# Altium PCB 8 Motors.PcbDoc (part 1 of 4)
Units mm, origin at the board's own origin, x right, y up, seen from the top; angles counter-clockwise.
Board outline 155 x 95 mm, 4 copper layers (Top Layer, GND, POWER, Bottom Layer), stack 0.778 mm thick; 196 components, 175 nets, 825 pads, 449 vias.
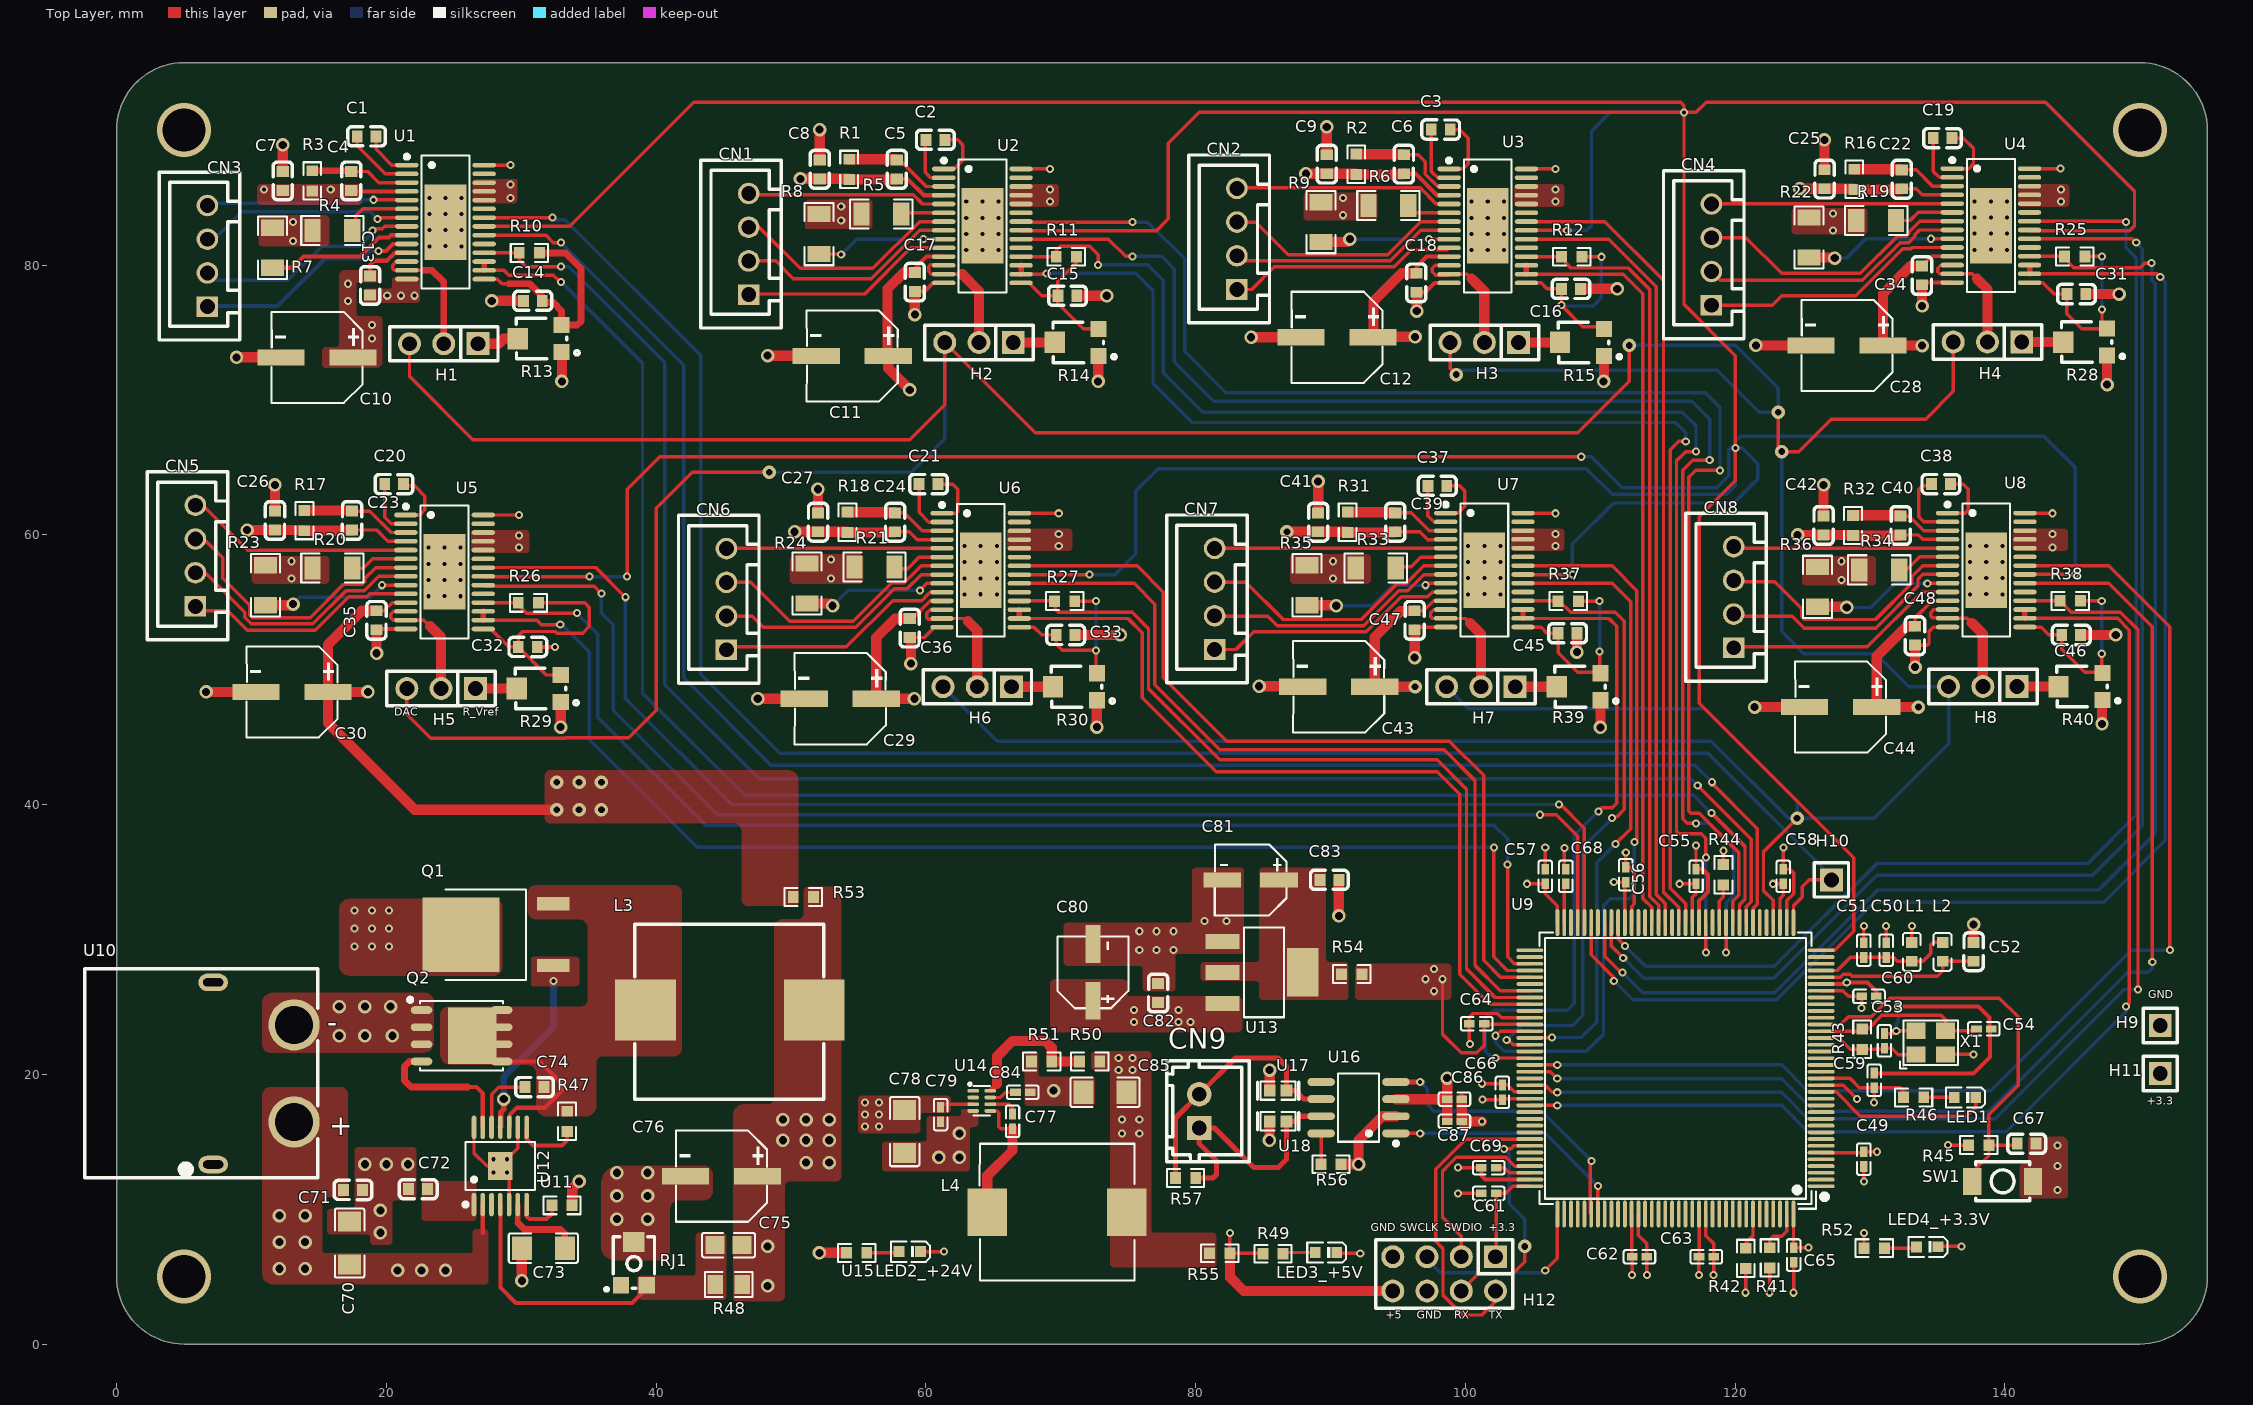
[diagram p0: Top Layer view]
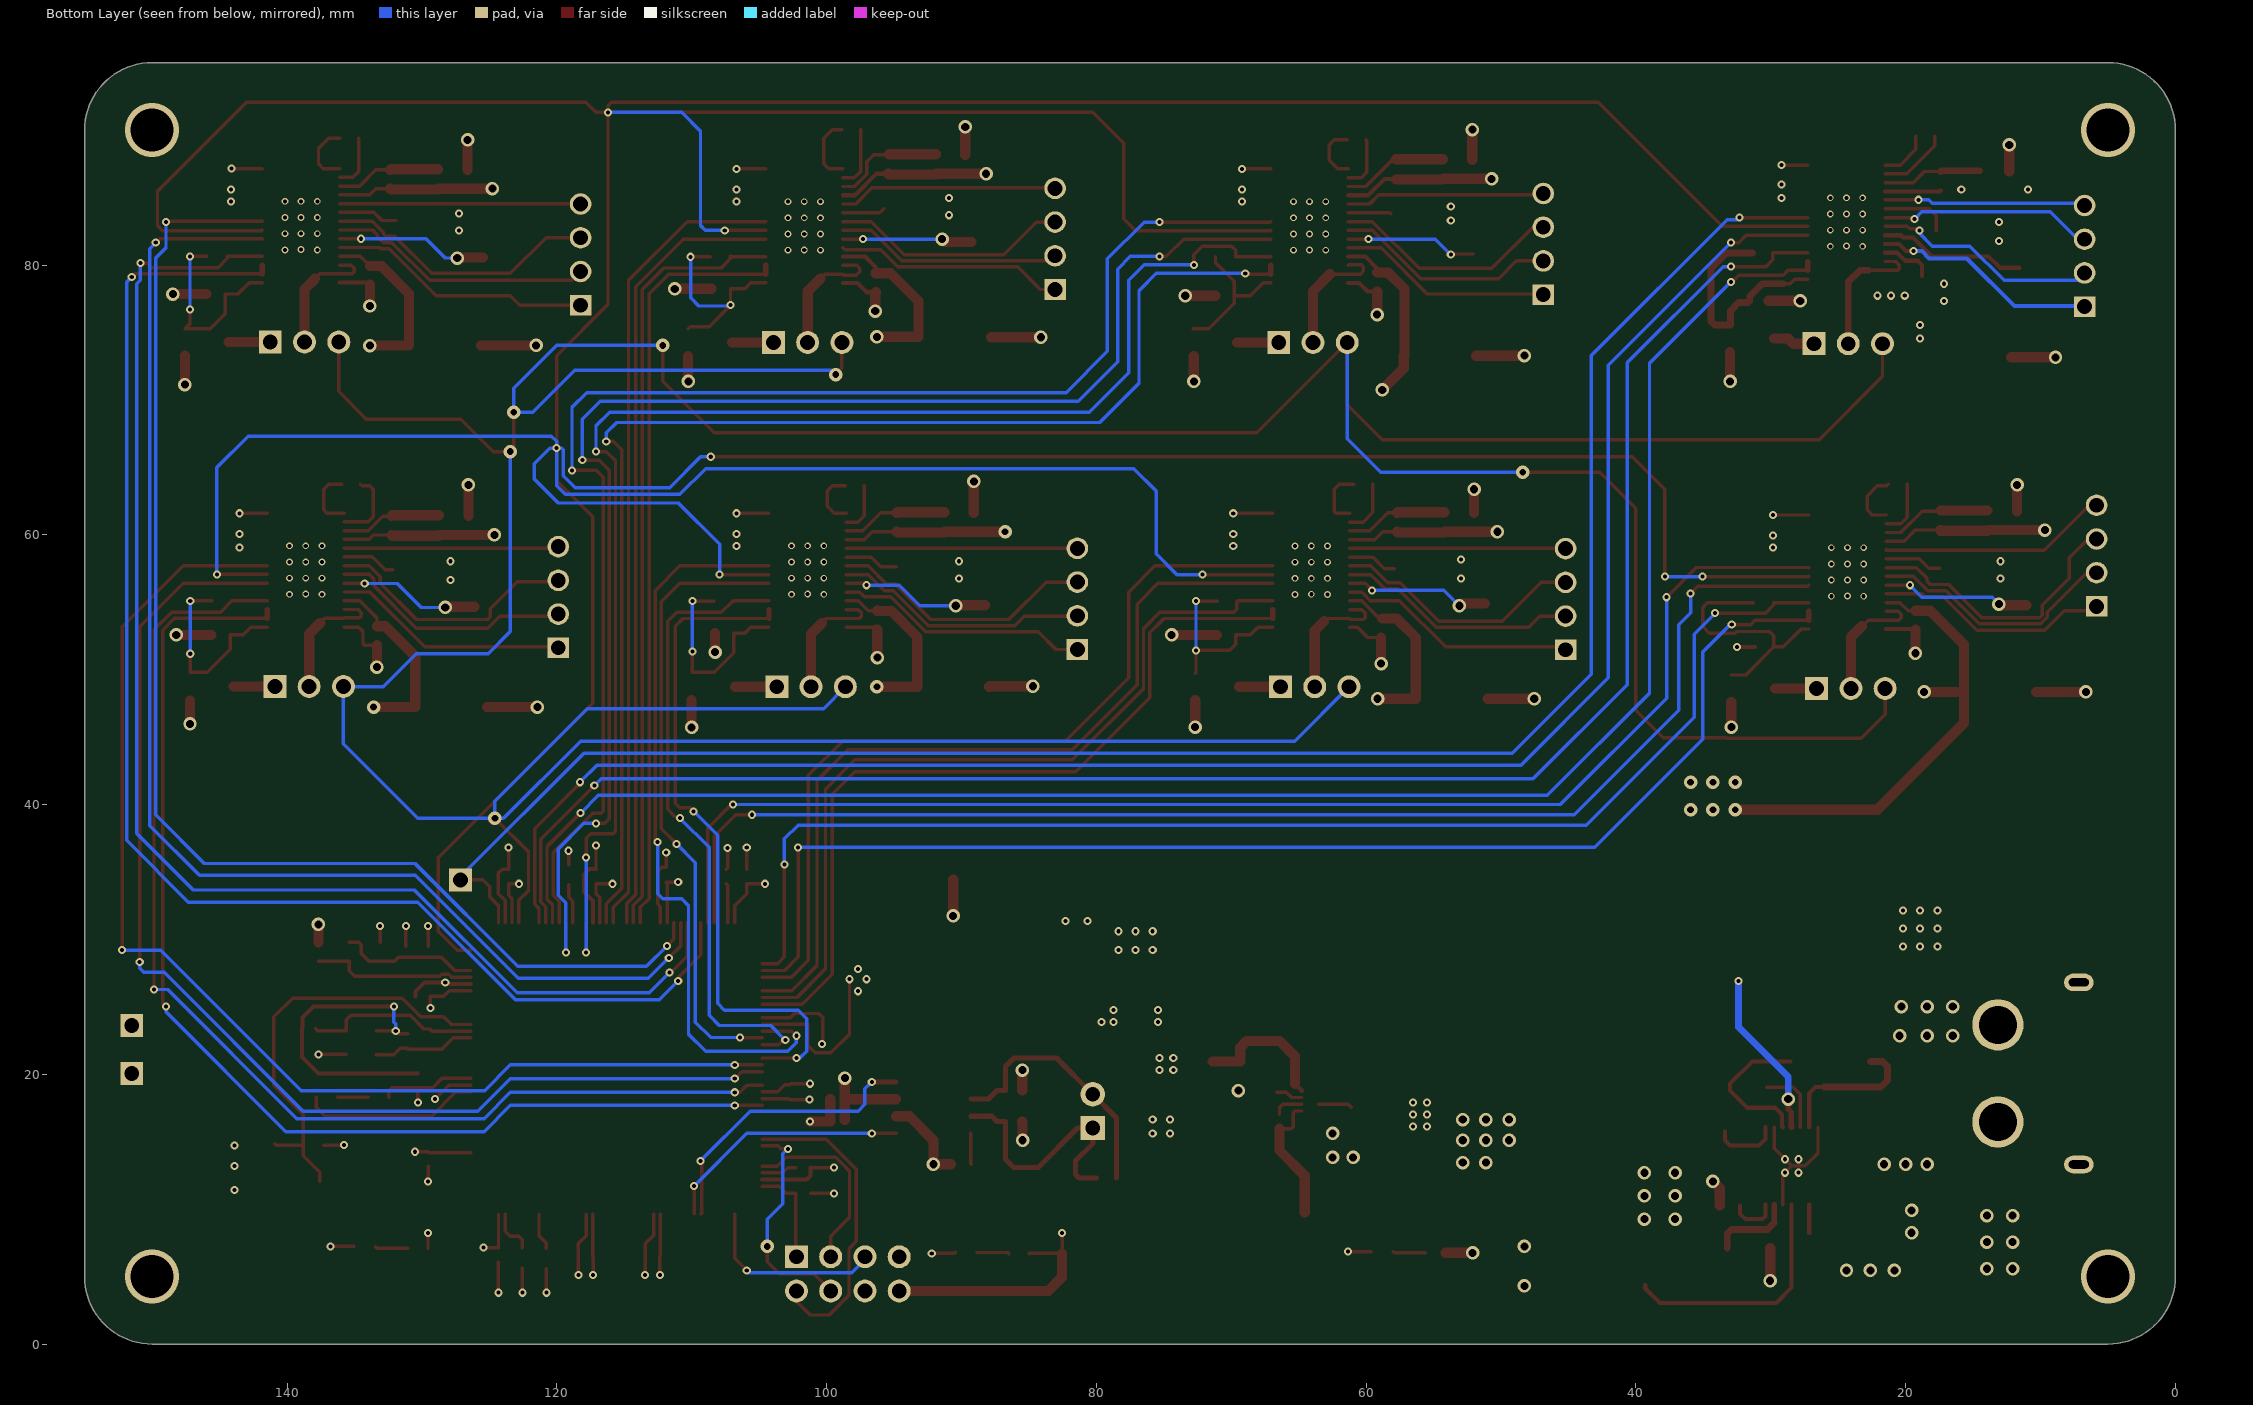
[diagram p1: Bottom Layer view, seen from below]
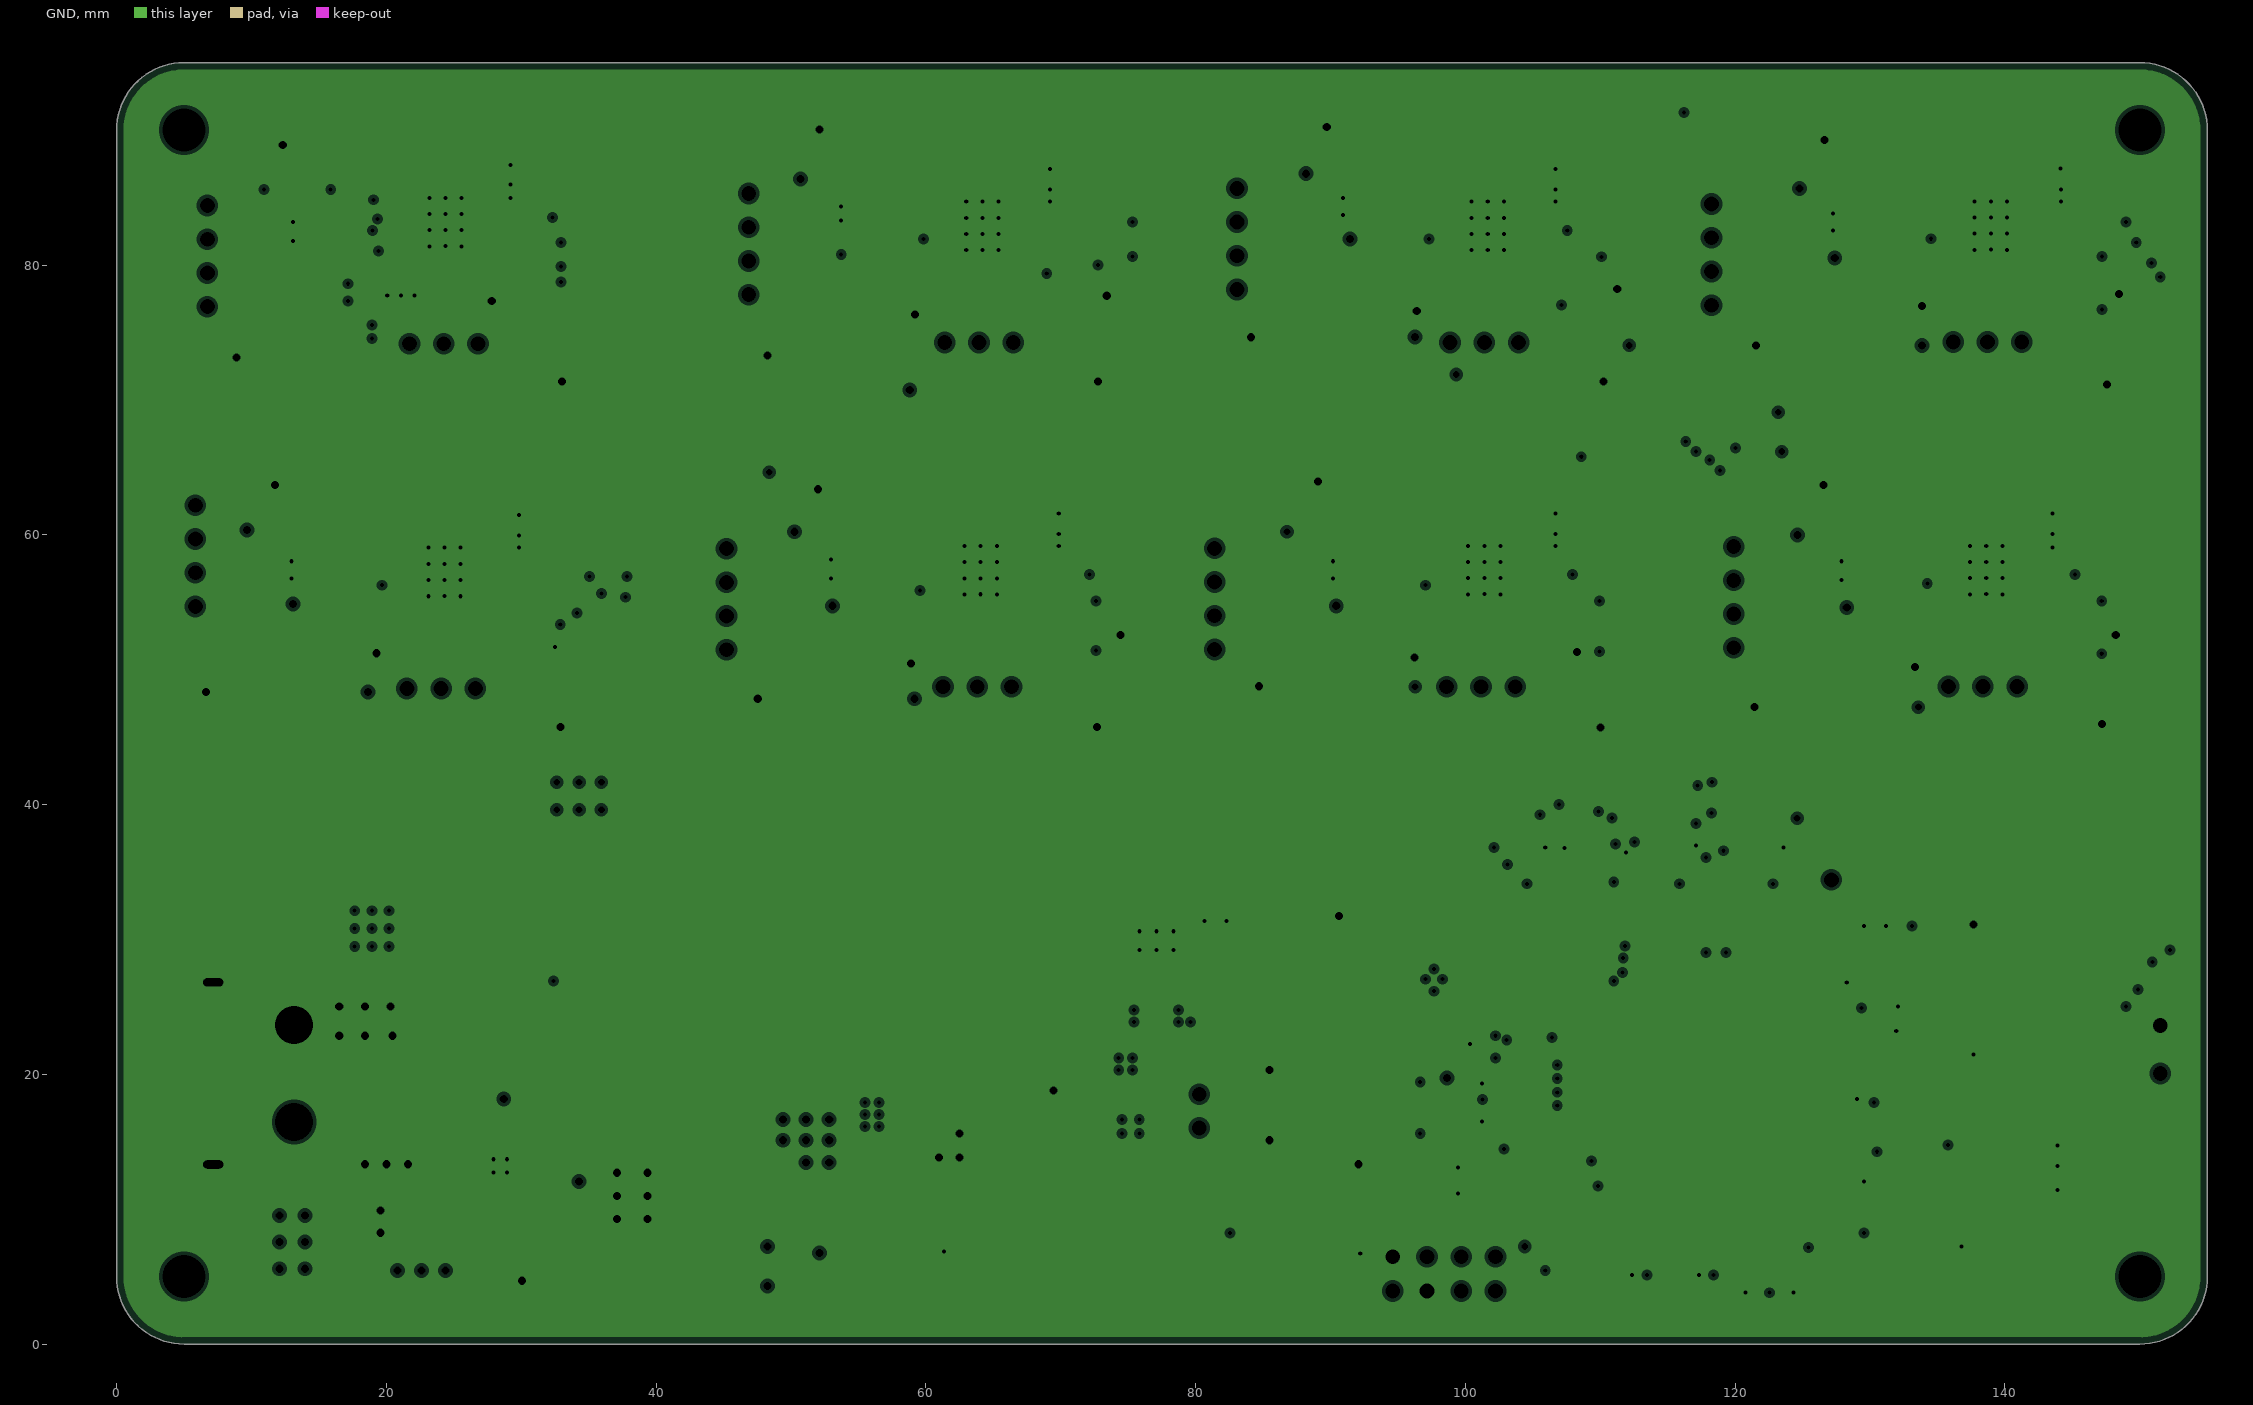
[diagram p2: GND, clearances drawn from the general rule]
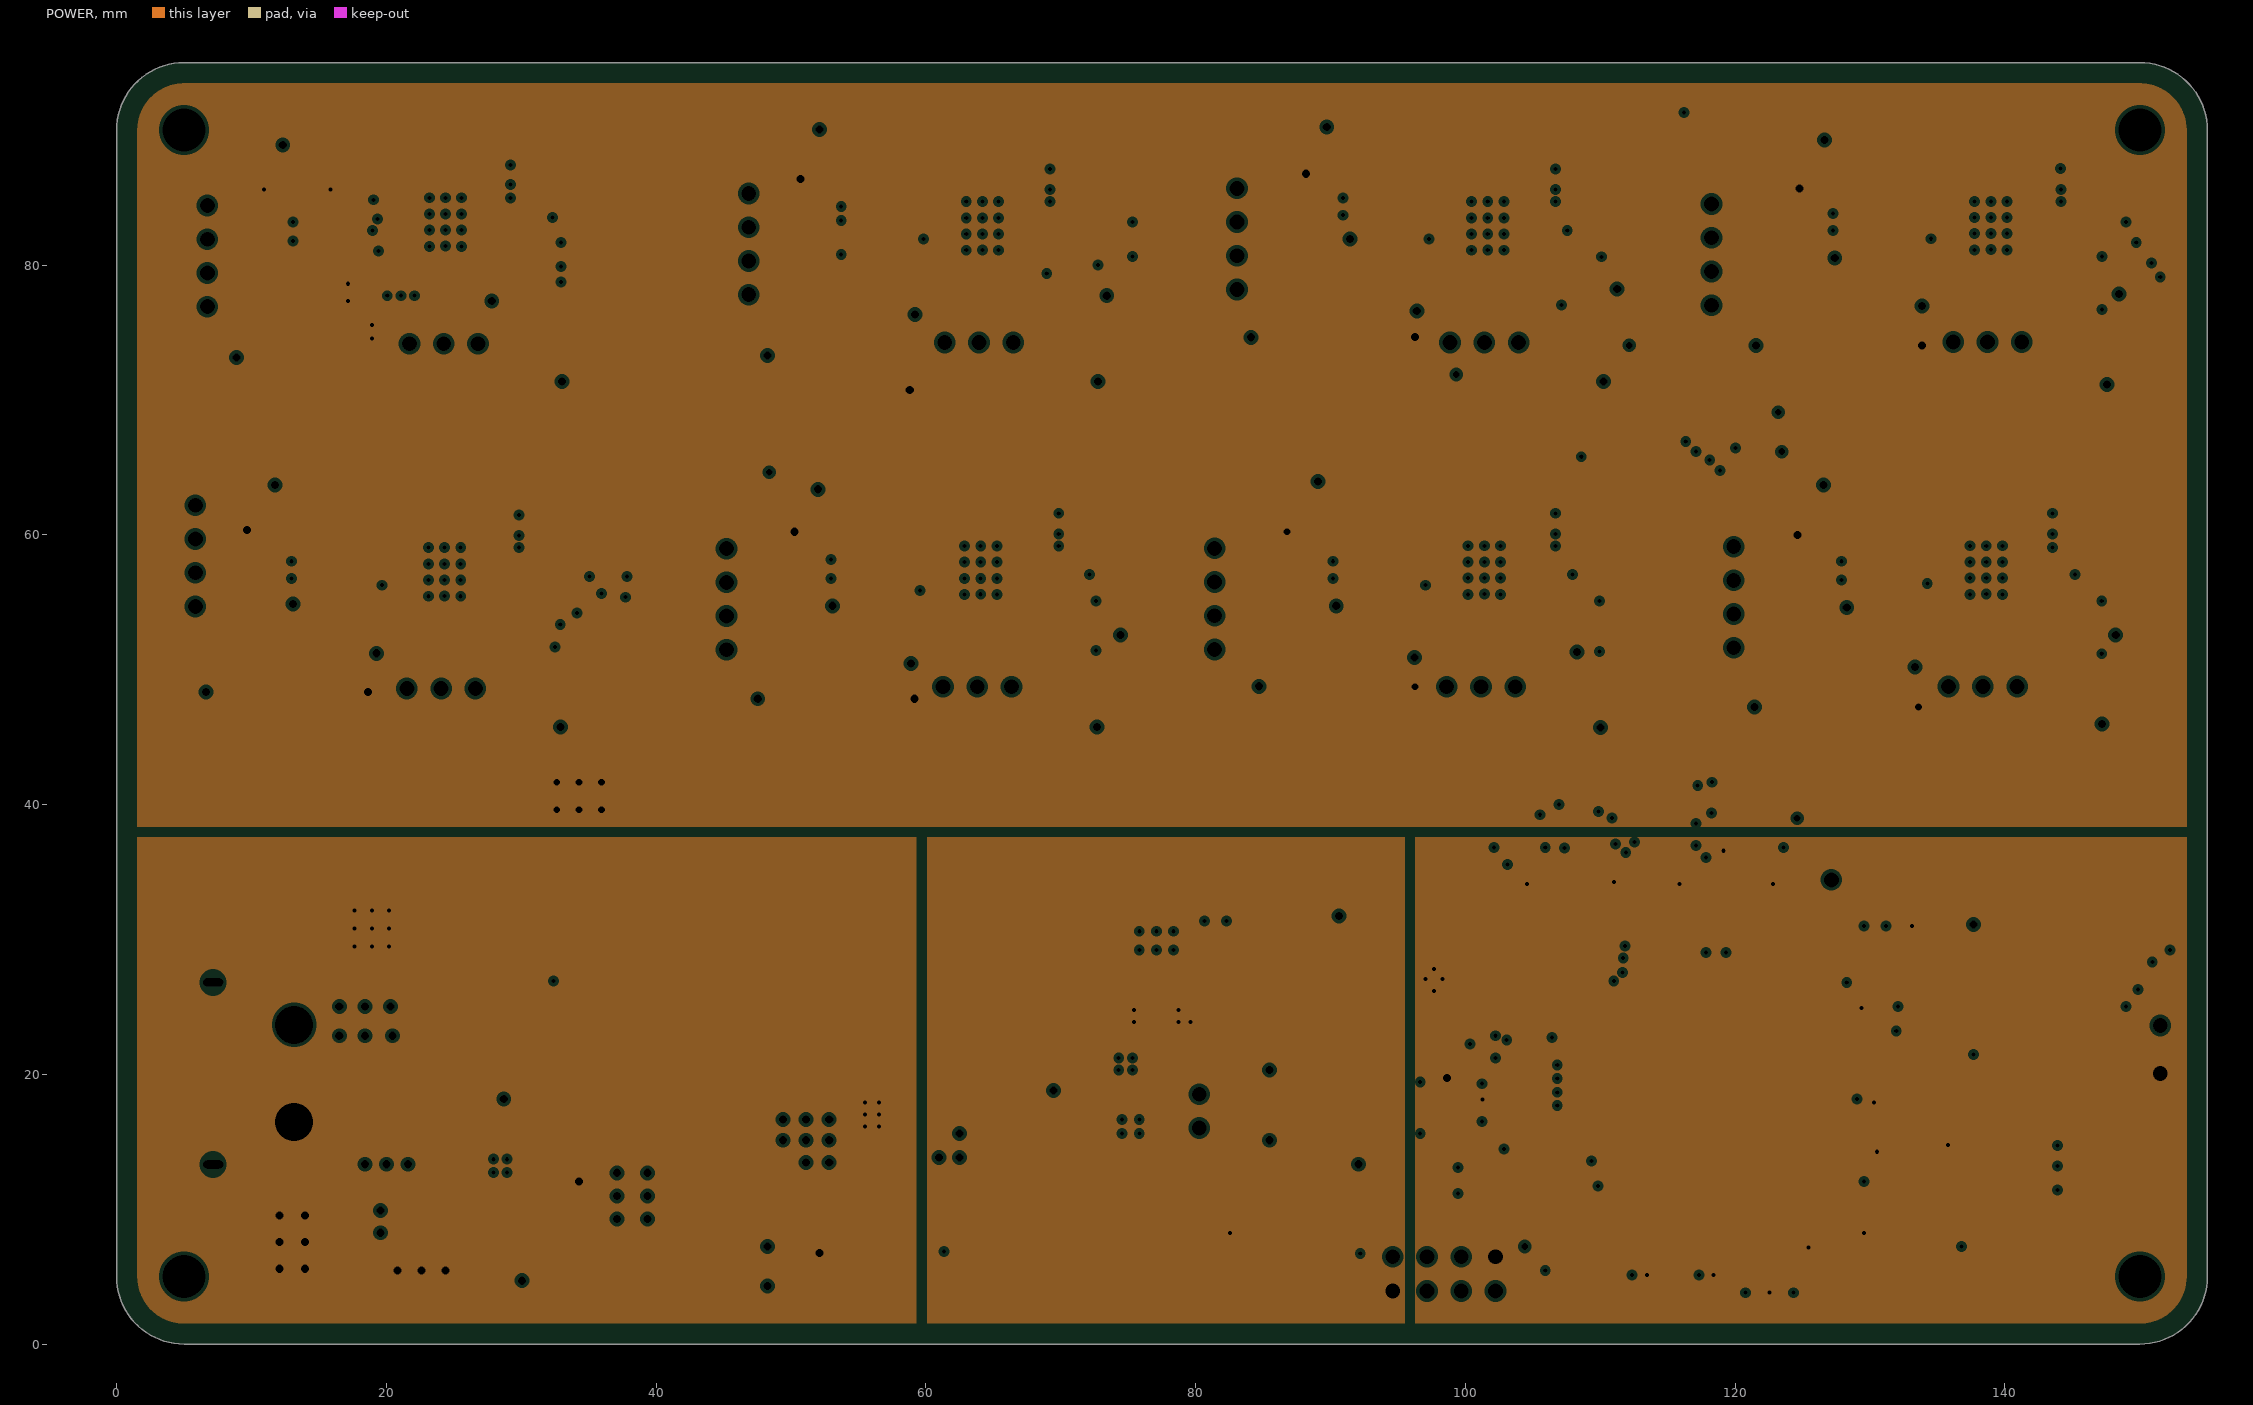
[diagram p3: POWER, clearances drawn from the general rule]

## Layer stack, top to bottom
Top Solder: solder mask 0.0102, Solder Resist, Dk 3.5
Top Layer: signal copper 0.0356
Dielectric 1: core 0.254, FR-4, Dk 4.2
GND: plane copper 0.036, net GND
Dielectric 3: prepreg 0.127, Dk 4.2
POWER: plane copper 0.036, net (Multiple Nets)
Dielectric 2: core 0.254, Dk 4.2
Bottom Layer: signal copper 0.0356
Bottom Solder: solder mask 0.0102, Solder Resist, Dk 3.5

## Board outline
0,5 0,90 cw(c5,90) 5,95 150,95 cw(c150,90) 155,90 155,5 cw(c150,5) 150,0 5,0 cw(c5,5)

## Design rules (kind name [scope] priority, off if disabled: settings)
Clearance [All] p1: gap=0.127 ignorepadtopadclearanceinfootprint=FALSE
DiffPairsRouting [All] p1: maxlimit=0.254 minlimit=0.254 mostfreqgap=0.254 toplayer_minwidth=0.381 toplayer_maxwidth=0.381 toplayer_prefwidth=0.381 bottomlayer_minwidth=0.381 bottomlayer_maxwidth=0.381 bottomlayer_prefwidth=0.381 maxuncoupledlength=12.7
HoleSize [All] p1: absolutevalues=TRUE maxlimit=5 minlimit=0.025 maxpercent=80.000 minpercent=20.000
PlaneClearance [All] p1: clearance=0.254
PlaneConnect [All] p1: planeconnectstyle=Relief reliefexpansion=0.508 reliefentries=4 reliefconductorwidth=0.254 reliefairgap=0.254
PolygonConnect [All] p1: connectstyle=Direct reliefconductorwidth=0.254 reliefentries=4 polygonreliefangle="90 Angle" airgapwidth=0.254
RoutingVias [All] p1: holewidth=0.6 width=1 viastyle="Through Hole" minholewidth=0.6 minwidth=1 maxholewidth=0.6 maxwidth=1
SilkToSolderMaskClearance [IsPad] p1 off: minsilkscreentomaskgap=0.254 clearancetoexposedcopper=TRUE
SolderMaskExpansion [All] p1: expansion=0.102
UnRoutedNet [All] p1: checkbadconnections=TRUE
Width [All] p1: maxlimit=2.032 minlimit=0.254 preferedwidth=0.254
24 further rules are at their usual default settings.

## Classes and differential pairs
component class 1: C49 C50 C51 C52 C53 C54 C55 C56 C57 C58 C59 C60 C61 C62 C63 C64 C65 C66 C67 C68 C69 C86 C87 CN9 H9 H10 H11 H12 L1 L2 LED1 R41 R42 R43 R44 R45 R46 R56 R57 SW1 U9 U16 U17 U18 X1
component class 2: C1 C2 C3 C4 C5 C6 C7 C8 C9 C10 C11 C12 C13 C14 C15 C16 C17 C18 C19 C20 C21 C22 C23 C24 C25 C26 C27 C28 C29 C30 C31 C32 C33 C34 C35 C36 C37 C38 C39 C40 C41 C42 C43 C44 C45 C46 C47 C48 CN1 CN2 CN3 CN4 CN5 CN6 CN7 CN8 H1 H2 H3 H4 H5 H6 H7 H8 R1 R2 R3 R4 R5 R6 R7 R8 R9 R10 R11 R12 R13 R14 R15 R16 R17 R18 R19 R20 R21 R22 R23 R24 R25 R26 R27 R28 R29 R30 R31 R32 R33 R34 R35 R36 R37 R38 R39 R40 U1 U2 U3 U4 U5 U6 U7 U8
component class Designator: C70 C71 C72 C73 C74 C75 C76 C77 C78 C79 C80 C81 C82 C83 C84 C85 L3 L4 LED2_+24V LED3_+5V LED4_+3.3V Q1 Q2 R47 R48 R49 R50 R51 R52 R53 R54 R55 RJ1 U10 U11 U12 U13 U14 U15
differential pair CAN: +CAN_P -CAN_N

## Components (designator, comment, footprint, x,y, rotation, side; value= is the part's Value field where it differs from the comment)
C1 "10nF" C0603 18.542,89.535 r0 top
C2 "10nF" C0603 60.706,89.281 r0 top
C3 "10nF" C0603 98.171,90.043 r0 top
C4 "100nF" C0603 17.399,86.233 r270 top
C5 "100nF" C0603 57.84,87.088 r270 top
C6 "100nF" C0603 95.432,87.469 r270 top
C7 "100nF" C0603 12.319,86.233 r270 top
C8 "100nF" C0603 52.125,87.088 r270 top
C9 "100nF" C0603 89.717,87.469 r270 top
C10 "100uF" SMD6.3_7.7_100uF 14.859,73.152 r180 top
C11 "100uF" SMD6.3_7.7_100uF 54.538,73.245 r180 top
C12 "100uF" SMD6.3_7.7_100uF 90.479,74.642 r180 top
C13 "100nF" C0603 18.796,78.486 r90 top
C14 "470nF" C0603 30.861,77.343 r0 top
C15 "470nF" C0603 70.485,77.724 r180 top
C16 "470nF" C0603 107.823,78.232 r180 top
C17 "100nF" C0603 59.182,78.74 r90 top
C18 "100nF" C0603 96.359,78.685 r90 top
C19 "10nF" C0603 135.382,89.408 r0 top
C20 "10nF" C0603 20.574,63.754 r0 top
C21 "10nF" C0603 60.198,63.754 r0 top
C22 "100nF" C0603 132.351,86.351 r270 top
C23 "100nF" C0603 17.454,61.053 r270 top
C24 "100nF" C0603 57.713,60.926 r270 top
C25 "100nF" C0603 126.619,86.36 r270 top
C26 "100nF" C0603 11.739,61.053 r270 top
C27 "100nF" C0603 51.998,60.926 r270 top
C28 "100uF" SMD6.3_7.7_100uF 128.287,74.032 r180 top
C29 "100uF" SMD6.3_7.7_100uF 53.649,47.845 r180 top
C30 "100uF" SMD6.3_7.7_100uF 13.009,48.353 r180 top
C31 "470nF" C0603 145.288,77.851 r180 top
C32 "470nF" C0603 30.48,51.689 r180 top
C33 "470nF" C0603 70.358,52.578 r180 top
C34 "100nF" C0603 133.849,79.231 r90 top
C35 "100nF" C0603 19.27,53.666 r90 top
C36 "100nF" C0603 58.801,53.086 r90 top
C37 "10nF" C0603 97.917,63.627 r0 top
C38 "10nF" C0603 135.255,63.754 r0 top
C39 "100nF" C0603 94.797,60.926 r270 top
C40 "100nF" C0603 132.262,60.687 r270 top
C41 "100nF" C0603 89.082,60.926 r270 top
C42 "100nF" C0603 126.547,60.687 r270 top
C43 "100uF" SMD6.3_7.7_100uF 90.606,48.734 r180 top
C44 "100uF" SMD6.3_7.7_100uF 127.817,47.225 r180 top
C45 "470nF" C0603 107.569,52.705 r180 top
C46 "470nF" C0603 144.907,52.578 r180 top
C47 "100nF" C0603 96.232,53.666 r90 top
C48 "100nF" C0603 133.331,52.523 r90 top
C49 "100nF" C0402_2.2uF 129.54,13.716 r270 top
C50 "10uF" C0402_2.2uF 131.191,29.21 r270 top
C51 "100nF" C0402_2.2uF 129.54,29.21 r270 top
C52 "22uF" C0603 137.668,29.083 r270 top
C53 "10pF" C0402_2.2uF 131.064,22.479 r270 top
C54 "10pF" C0402_2.2uF 138.43,23.368 r180 top
C55 "100nF" C0402_2.2uF 117.094,34.671 r90 top
C56 "100nF" C0402_2.2uF 111.887,34.798 r90 top
C57 "100nF" C0402_2.2uF 105.918,34.671 r90 top
C58 "100nF" C0402_2.2uF 123.571,34.671 r90 top
C59 "100nF" C0402_2.2uF 130.302,19.558 r90 top
C60 "100nF" C0402_2.2uF 129.921,25.781 r0 top
C61 "100nF" C0402_2.2uF 101.727,11.176 r180 top
C62 "100nF" C0402_2.2uF 112.903,6.477 r180 top
C63 "100nF" C0402_2.2uF 117.856,6.477 r180 top
C64 "100nF" C0402_2.2uF 100.838,23.749 r180 top
C65 "100nF" C0402_2.2uF 124.333,6.604 r270 top
C66 "100nF" C0402_2.2uF 102.743,18.669 r90 top
C67 "100nF" C0603 141.605,14.859 r180 top
C68 "2.2uF" C0402_2.2uF 107.442,34.671 r270 top
C69 "2.2uF" C0402_2.2uF 101.727,13.081 r0 top
C70 "4.7uF" C1206 17.272,7.493 r270 top
C71 "100nF" C0603 17.526,11.43 r180 top
C72 "2.2uF" C0603 22.352,11.488 r180 top
C73 "15nF" C1206 31.637,7.112 r0 top
C74 "470nF" C0603 30.988,19.05 r0 top
C75 "82pF" C0805 45.369,7.338 r0 top
C76 "180uF" SMD6.3_10_180uF 44.845,12.446 r180 top
C77 "100nF" C0402_2.2uF 66.421,16.51 r270 top
C78 "10uF" C1206 58.42,15.748 r90 top
C79 "100nF" C0402_2.2uF 61.087,17.018 r90 top
C80 "10uF" SMD5_5.4_10uF 72.39,27.559 r90 top
C81 "10uF" SMD5_5.4_10uF 84.074,34.417 r180 top
C82 "100nF" C0603 77.216,26.035 r90 top
C83 "100nF" C0603 89.916,34.417 r0 top
C84 "33nF" C0402_2.2uF 67.183,18.669 r180 top
C85 "47uF" C1206 73.279,18.669 r0 top
C86 "10uF" C0402_2.2uF 99.187,18.161 r0 top
C87 "100nF" C0402_2.2uF 99.187,16.51 r0 top
CN1 "#NAME?" ZX-XH2.54-4PZZ 46.863,81.554 r90 top
CN2 "#NAME?" ZX-XH2.54-4PZZ 83.058,81.935 r90 top
CN3 "#NAME?" ZX-XH2.54-4PZZ 6.731,80.665 r90 top
CN4 "#NAME?" ZX-XH2.54-4PZZ 118.237,80.772 r90 top
CN5 "#NAME?" ZX-XH2.54-4PZZ 5.842,58.44 r90 top
CN6 "#NAME?" ZX-XH2.54-4PZZ 45.212,55.225 r90 top
CN7 "#NAME?" ZX-XH2.54-4PZZ 81.407,55.245 r90 top
CN8 "#NAME?" ZX-XH2.54-4PZZ 119.888,55.372 r90 top
CN9 "#NAME?" ZX-XH2.54-2PZZ 80.264,17.272 r90 top
H1 "#NAME?" HC-1.25-3PLT 24.257,74.168 r180 top
H2 "#NAME?" HC-1.25-3PLT 63.936,74.261 r180 top
H3 "#NAME?" HC-1.25-3PLT 101.401,74.261 r180 top
H4 "#NAME?" HC-1.25-3PLT 138.701,74.286 r180 top
H5 "#NAME?" HC-1.25-3PLT 24.058,48.607 r180 top
H6 "#NAME?" HC-1.25-3PLT 63.809,48.734 r180 top
H7 "#NAME?" HC-1.25-3PLT 101.147,48.734 r180 top
H8 "#NAME?" HC-1.25-3PLT 138.358,48.749 r180 top
H9 "#NAME?" Testpoint 151.511,23.622 r270 top
H10 "#NAME?" Testpoint 127.127,34.417 r270 top
H11 "#NAME?" Testpoint 151.511,20.066 r0 top
H12 "#NAME?" HC-1.25-8PLT 98.425,5.207 r180 top
L1 "22uH" L0603_22uH 133.096,29.083 r90 top
L2 "22uH" L0603_22uH 135.382,29.083 r90 top
L3 "3.3uH" L1360 45.466,24.765 r0 top
L4 "10uH" L1110_10uH 69.723,9.779 r0 top
LED1 "#NAME?" LED 137.033,18.288 r180 top
LED2_+24V "#NAME?" LED 58.801,6.858 r180 top (schematic designator LED2)
LED3_+5V "#NAME?" LED 89.662,6.794 r180 top (schematic designator LED3)
LED4_+3.3V "#NAME?" LED 134.239,7.207 r180 top (schematic designator LED4)
Q1 "#NAME?" NMOS 28.956,30.353 r180 top
Q2 "#NAME?" CSD18533Q5A 25.576,22.86 r270 top
R1 "1MΩ" R0603 54.311,87.088 r90 top
R2 "1MΩ" R0603 91.903,87.469 r90 top
R3 "1MΩ" R0603 14.505,86.233 r90 top
R4 "200mΩ" R1206_200mΩ 16.002,82.55 r0 top
R5 "200mΩ" R1206_200mΩ 56.697,83.786 r0 top
R6 "200mΩ" R1206_200mΩ 94.289,84.421 r0 top
R7 "200mΩ" R1206_200mΩ 11.557,81.28 r270 top
R8 "200mΩ" R1206_200mΩ 52.07,82.296 r270 top
R9 "200mΩ" R1206_200mΩ 89.281,83.185 r270 top
R10 "10kΩ" R0603_10KΩ 30.607,80.899 r0 top
R11 "10kΩ" R0603_10KΩ 70.413,80.611 r0 top
R12 "10kΩ" R0603_10KΩ 107.878,80.611 r0 top
R13 "10kΩ" R10k_KT 31.369,74.549 r0 top
R14 "10kΩ" R10k_KT 71.175,74.261 r0 top
R15 "10kΩ" R10k_KT 108.64,74.261 r0 top
R16 "1MΩ" R0603 128.822,86.351 r90 top
R17 "1MΩ" R0603 13.925,61.053 r90 top
R18 "1MΩ" R0603 54.184,60.926 r90 top
R19 "200mΩ" R1206_200mΩ 130.446,83.303 r0 top
R20 "200mΩ" R1206_200mΩ 16.002,57.531 r0 top
R21 "200mΩ" R1206_200mΩ 56.189,57.624 r0 top
R22 "200mΩ" R1206_200mΩ 125.476,82.042 r270 top
R23 "200mΩ" R1206_200mΩ 11.049,56.261 r270 top
R24 "200mΩ" R1206_200mΩ 51.181,56.388 r270 top
R25 "10kΩ" R0603_10KΩ 145.178,80.636 r0 top
R26 "10kΩ" R0603_10KΩ 30.535,54.957 r0 top
R27 "10kΩ" R0603_10KΩ 70.286,55.084 r0 top
R28 "10kΩ" R10k_KT 145.94,74.286 r0 top
R29 "10kΩ" R10k_KT 31.297,48.607 r0 top
R30 "10kΩ" R10k_KT 71.048,48.734 r0 top
R31 "1MΩ" R0603 91.268,60.926 r90 top
R32 "1MΩ" R0603 128.733,60.687 r90 top
R33 "200mΩ" R1206_200mΩ 93.345,57.531 r0 top
R34 "200mΩ" R1206_200mΩ 130.683,57.404 r0 top
R35 "200mΩ" R1206_200mΩ 88.265,56.261 r270 top
R36 "200mΩ" R1206_200mΩ 126.111,56.134 r270 top
R37 "10kΩ" R0603_10KΩ 107.624,55.084 r0 top
R38 "10kΩ" R0603_10KΩ 144.835,55.099 r0 top
R39 "10kΩ" R10k_KT 108.386,48.734 r0 top
R40 "10kΩ" R10k_KT 145.597,48.749 r0 top
R41 "0Ω" R0603 122.555,6.388 r90 top
R42 "0Ω" R0603 120.777,6.35 r90 top
R43 "1MΩ" R0603 129.413,22.606 r90 top
R44 "10kΩ" R0603_10KΩ 119.126,34.798 r90 top
R45 "10kΩ" R0603_10KΩ 138.049,14.753 r180 top
R46 "2kΩ" R0603 133.223,18.288 r180 top
R47 "2.15kΩ" R0603 33.401,16.51 r90 top
R48 "140kΩ" R0805 45.385,4.417 r0 top
R49 "10kΩ" R0603_10KΩ 85.734,6.7 r180 top
R50 "52.3kΩ" R0603_10KΩ 72.136,20.955 r0 top
R51 "10kΩ" R0603_10KΩ 68.58,20.955 r0 top
R52 "4.7kΩ" R0603_10KΩ 130.302,7.112 r180 top
R53 "0Ω" R0603 50.918,33.147 r180 top
R54 "0Ω" R0603 91.567,27.432 r0 top
R55 "0Ω" R0603 81.788,6.731 r0 top
R56 "10kΩ" R0603 90.034,13.335 r0 top
R57 "120Ω" R0603 79.248,12.319 r0 top
RJ1 "20kΩ" R20k_KT 38.354,5.969 r0 top
SW1 "#NAME?" Switch 139.827,12.065 r0 top
U1 "#NAME?" DRV8825PWPR 24.384,83.185 r270 top
U2 "#NAME?" DRV8825PWPR 64.19,82.897 r270 top
U3 "#NAME?" DRV8825PWPR 101.655,82.897 r270 top
U4 "#NAME?" DRV8825PWPR 138.955,82.922 r270 top
U5 "#NAME?" DRV8825PWPR 24.312,57.243 r270 top
U6 "#NAME?" DRV8825PWPR 64.063,57.37 r270 top
U7 "#NAME?" DRV8825PWPR 101.401,57.385 r270 top
U8 "#NAME?" DRV8825PWPR 138.612,57.385 r270 top
U9 "#NAME?" STM32F407ZGT6 115.57,20.447 r90 top
U10 "#NAME?" XT60PW-F 10.16,20.066 r90 top
U11 "147kΩ" R0603 33.02,10.287 r0 top
U12 "#NAME?" LM3150MHX/NOPB 28.448,13.208 r0 top
U13 "#NAME?" AMS1117-3.3 84.963,27.559 r180 top
U14 "#NAME?" TPS62932DRLR 64.135,18.034 r270 top
U15 "100kΩ" R0603 54.864,6.763 r180 top
U16 "#NAME?" SN65HVD230DR 92.075,17.526 r90 top
U17 "#NAME?" PESD0603-240 86.106,18.796 r0 top
U18 "#NAME?" PESD0603-240 86.106,16.51 r0 top
X1 "8MHz" Osc_8M 134.493,22.352 r0 top

## Footprints (in the part's own frame and the unit in brackets; to place one, negate y for a bottom-side part, rotate by r counter-clockwise, add the part's x,y. Pads: shape width x height; smd on the part's side, far side on the other; paste and mask are expansions set on the pad)
AMS1117-3.3 [mm] "SOT-223-3_L6.5-W3.4-P2.30-LS7.0-BR"
  rect 2.5x1.1 smd: 1(2.97,-2.3) 2(2.97,0) 3(2.97,2.3)
  rect 2.34x3.6 smd: 4(-2.97,0)
  silkscreen extent -1.57,-3.33 1.37,3.33
C0402_2.2uF [mm] "C0402"
  rect 0.79x0.54 smd paste-100 mask+0.051: 1(-0.545,0) 2(0.545,0)
  silkscreen extent -1.17,-0.5 1.17,0.5
C0603 [mm] "C0603"
  rect 0.8x0.9 smd: 1(-0.7,0) 2(0.7,0)
  silkscreen extent -1.41,-0.71 1.39,0.72
C0805 [mm] "C0805"
  rect 1.41x1.35 smd paste-100 mask+0.051: 1(-1,0) 2(1,0)
  silkscreen extent -1.96,-0.9 1.96,0.9
C1206 [mm] "C1206"
  rect 1.485x1.728 smd paste-100 mask+0.051: 1(-1.593,0) 2(1.593,0)
  silkscreen extent -2.56,-1.09 2.56,1.09
CSD18533Q5A [mm] "PQFN-8_L5.8-W4.9-P1.27-LS6.0-BL"
  oval 0.574x1.6 smd paste-100 mask+0.051: 1(-1.905,-2.97) 2(-0.635,-2.97) 3(0.635,-2.97) 4(1.905,-2.97) 5(1.905,2.97) 6(0.635,2.97) 7(-0.635,2.97) 8(-1.905,2.97)
  rect 4.2x3.58 smd paste-100 mask+0.051: 9(0,0.788)
  silkscreen extent -2.82,-3.96 2.58,3.08
DRV8825PWPR [mm] "HTSSOP-28_L9.7-W4.4-P0.65-LS6.4-BL-EP"
  oval 0.343x1.731 smd: 1(-4.225,-2.866) 2(-3.575,-2.866) 3(-2.925,-2.866) 4(-2.275,-2.866) 5(-1.625,-2.866) 6(-0.975,-2.866) 7(-0.325,-2.866) 8(0.325,-2.866) 9(0.975,-2.866) 10(1.625,-2.866) 11(2.275,-2.866) 12(2.925,-2.866) 13(3.575,-2.866) 14(4.225,-2.866) 15(4.225,2.866) 16(3.575,2.866) 17(2.925,2.866) 18(2.275,2.866) 19(1.625,2.866) 20(0.975,2.866) 21(0.325,2.866) 22(-0.325,2.866) 23(-0.975,2.866) 24(-1.625,2.866) 25(-2.275,2.866) 26(-2.925,2.866) 27(-3.575,2.866) 28(-4.225,2.866)
  rect 5.6x3.1 smd paste+0 mask+0.05: 29(0,0)
  silkscreen extent -5,-3.02 4.93,1.77
HC-1.25-3PLT [mm] "HDR-TH_3P-P2.54-V-M"
  rect 1.7x1.7 hole 1.1: 1(-2.54,0)
  round 1.7 hole 1.1: 2(0,0) 3(2.54,0)
  silkscreen extent -4.02,-1.27 4.02,1.27
HC-1.25-8PLT [mm] "HDR-TH_8P-P2.54-V-M-R2-C4-S2.54"
  rect 1.7x1.7 hole 1.1: 1(-3.81,-1.27)
  round 1.7 hole 1.1: 2(-3.81,1.27) 3(-1.27,-1.27) 4(-1.27,1.27) 5(1.27,-1.27) 6(1.27,1.27) 7(3.81,-1.27) 8(3.81,1.27)
  silkscreen extent -5.08,-2.54 5.08,2.54
L0603_22uH [mm] "L0603"
  rect 0.8x0.864 smd paste-100 mask+0.051: 1(-0.7,0) 2(0.7,0)
  silkscreen extent -1.42,-0.65 1.41,0.67
L1110_10uH [mm] "IND-SMD_L11.5-W10.0_SMMS1040"
  rect 2.924x3.5 smd: 1(-5.18,0) 2(5.18,0)
  silkscreen extent -5.74,-5.08 5.75,5.08
L1360 [mm] "IND-SMD_L13.8-W12.6"
  rect 4.5x4.5 smd: 1(-6.25,0) 2(6.25,0)
  silkscreen extent -7.05,-6.63 6.95,6.37
LED [mm] "LED0603-RD_GREEN"
  rect 0.8x0.8 smd: 1(-0.799,-0.003) 2(0.799,0.003)
  silkscreen extent -1.49,-0.75 1.39,0.76
LM3150MHX/NOPB [mm] "HTSSOP-14_L5.0-W4.4-P0.65-LS6.4-BL-EP"
  oval 0.343x1.731 smd: 1(-1.95,-2.866) 2(-1.3,-2.866) 3(-0.65,-2.866) 4(0,-2.866) 5(0.65,-2.866) 6(1.3,-2.866) 7(1.95,-2.866) 8(1.95,2.866) 9(1.3,2.866) 10(0.65,2.866) 11(0,2.866) 12(-0.65,2.866) 13(-1.3,2.866) 14(-1.95,2.866)
  rect 1.83x2.055 smd: 15(0,0)
  silkscreen extent -2.72,-3.02 2.58,1.77
NMOS [mm] "TO-252-2_L6.6-W6.1-P4.58-LS9.9-TL"
  rect 2.409x0.979 smd: 1(-3.424,2.29) 3(-3.423,-2.29)
  rect 5.711x5.548 smd: 2(3.424,0)
  silkscreen extent -1.38,-3.35 4.58,3.35
Osc_8M [mm] "OSC-SMD_4P-L3.2-W2.5-BL"
  rect 1.4x1.2 smd: 1(-1.1,-0.875) 2(1.1,-0.875) 3(1.1,0.875) 4(-1.1,0.875)
  silkscreen extent -2.29,-1.9 2.03,1.65
PESD0603-240 [mm] "D0603-BI"
  rect 0.873x0.907 smd paste-100 mask+0.051: 1(-0.622,0) 2(0.622,0)
  silkscreen extent -1.52,-0.68 1.52,0.68
R10k_KT [mm] "RES-ADJ-SMD_3P-L3.0-W3.8-P1.75-BR"
  rect 1.2x1.2 smd: 1(1.625,-1) 3(1.625,1)
  rect 1.5x1.6 smd: 2(-1.625,0)
  silkscreen extent -1.75,-1.51 2.92,1.51
R20k_KT [mm] "RES-ADJ-SMD_TC33X-2-104E"
  rect 1.2x1.2 smd: 1(-0.95,-1.6) 3(0.95,-1.6)
  rect 1.6x1.5 smd: 2(0,1.6)
  silkscreen extent -2.16,-2.03 1.52,1.98
R0603 [mm] "0603"
  rect 0.806x0.864 smd paste-100 mask+0.051: 1(-0.753,0) 2(0.753,0)
  silkscreen extent -1.39,-0.66 1.39,0.66
R0603_10KΩ [mm] "R0603"
  rect 0.806x0.864 smd paste-100 mask+0.051: 1(-0.753,0) 2(0.753,0)
  silkscreen extent -1.39,-0.66 1.39,0.66
R0805 [mm] "R0805"
  rect 1.133x1.377 smd paste-100 mask+0.051: 1(-1,0) 2(1,0)
  silkscreen extent -1.76,-0.92 1.76,0.92
R1206_200mΩ [mm] "R1206"
  rect 1.208x1.701 smd paste-100 mask+0.051: 1(-1.479,0) 2(1.479,0)
  silkscreen extent -2.31,-1.08 2.31,1.08
SMD5_5.4_10uF [mm] "CAP-SMD_BD5.0-L5.3-W5.3-FD"
  rect 2.8x1.1 smd: 1(-2.1,0) 2(2.1,0)
  silkscreen extent -2.66,-2.62 2.66,2.65
SMD6.3_7.7_100uF [mm] "CAP-SMD_BD6.3-L6.6-W6.6-LS7.4-FD"
  rect 3.5x1.2 smd: 1(-2.67,0) 2(2.67,0)
  silkscreen extent -3.38,-3.38 3.38,3.38
SMD6.3_10_180uF [mm] "CAP-SMD_BD6.3-L6.6-W6.6-LS7.3-FD"
  rect 3.5x1.2 smd: 1(-2.67,0) 2(2.67,0)
  silkscreen extent -3.38,-3.38 3.38,3.38
SN65HVD230DR [mm] "SOIC-8_L4.9-W3.9-P1.27-LS6.0-BL"
  oval 0.588x2.045 smd: 1(-1.905,-2.772) 2(-0.635,-2.772) 3(0.635,-2.772) 4(1.905,-2.772) 5(1.905,2.772) 6(0.635,2.772) 7(-0.635,2.772) 8(-1.905,2.772)
  silkscreen extent -2.8,-2.92 2.53,1.52
STM32F407ZGT6 [mm] "LQFP-144_L20.0-W20.0-P0.50-LS22.0-BL"
  oval 0.28x2 smd: 1(-8.75,-10.8) 2(-8.25,-10.8) 3(-7.75,-10.8) 4(-7.25,-10.8) 5(-6.75,-10.8) 6(-6.25,-10.8) 7(-5.75,-10.8) 8(-5.25,-10.8) 9(-4.75,-10.8) 10(-4.25,-10.8) 11(-3.75,-10.8) 12(-3.25,-10.8) 13(-2.75,-10.8) 14(-2.25,-10.8) 15(-1.75,-10.8) 16(-1.25,-10.8) 17(-0.75,-10.8) 18(-0.25,-10.8) 19(0.25,-10.8) 20(0.75,-10.8) 21(1.25,-10.8) 22(1.75,-10.8) 23(2.25,-10.8) 24(2.75,-10.8) 25(3.25,-10.8) 26(3.75,-10.8) 27(4.25,-10.8) 28(4.75,-10.8) 29(5.25,-10.8) 30(5.75,-10.8) 31(6.25,-10.8) 32(6.75,-10.8) 33(7.25,-10.8) 34(7.75,-10.8) 35(8.25,-10.8) 36(8.75,-10.8) 73(8.75,10.8) 74(8.25,10.8) 75(7.75,10.8) 76(7.25,10.8) 77(6.75,10.8) 78(6.25,10.8) 79(5.75,10.8) 80(5.25,10.8) 81(4.75,10.8) 82(4.25,10.8) 83(3.75,10.8) 84(3.25,10.8) 85(2.75,10.8) 86(2.25,10.8) 87(1.75,10.8) 88(1.25,10.8) 89(0.75,10.8) 90(0.25,10.8) 91(-0.25,10.8) 92(-0.75,10.8) 93(-1.25,10.8) 94(-1.75,10.8) 95(-2.25,10.8) 96(-2.75,10.8) 97(-3.25,10.8) 98(-3.75,10.8) 99(-4.25,10.8) 100(-4.75,10.8) 101(-5.25,10.8) 102(-5.75,10.8) 103(-6.25,10.8) 104(-6.75,10.8) 105(-7.25,10.8) 106(-7.75,10.8) 107(-8.25,10.8) 108(-8.75,10.8)
  oval 2x0.28 smd: 37(10.8,-8.75) 38(10.8,-8.25) 39(10.8,-7.75) 40(10.8,-7.25) 41(10.8,-6.75) 42(10.8,-6.25) 43(10.8,-5.75) 44(10.8,-5.25) 45(10.8,-4.75) 46(10.8,-4.25) 47(10.8,-3.75) 48(10.8,-3.25) 49(10.8,-2.75) 50(10.8,-2.25) 51(10.8,-1.75) 52(10.8,-1.25) 53(10.8,-0.75) 54(10.8,-0.25) 55(10.8,0.25) 56(10.8,0.75) 57(10.8,1.25) 58(10.8,1.75) 59(10.8,2.25) 60(10.8,2.75) 61(10.8,3.25) 62(10.8,3.75) 63(10.8,4.25) 64(10.8,4.75) 65(10.8,5.25) 66(10.8,5.75) 67(10.8,6.25) 68(10.8,6.75) 69(10.8,7.25) 70(10.8,7.75) 71(10.8,8.25) 72(10.8,8.75) 109(-10.8,8.75) 110(-10.8,8.25) 111(-10.8,7.75) 112(-10.8,7.25) 113(-10.8,6.75) 114(-10.8,6.25) 115(-10.8,5.75) 116(-10.8,5.25) 117(-10.8,4.75) 118(-10.8,4.25) 119(-10.8,3.75) 120(-10.8,3.25) 121(-10.8,2.75) 122(-10.8,2.25) 123(-10.8,1.75) 124(-10.8,1.25) 125(-10.8,0.75) 126(-10.8,0.25) 127(-10.8,-0.25) 128(-10.8,-0.75) 129(-10.8,-1.25) 130(-10.8,-1.75) 131(-10.8,-2.25) 132(-10.8,-2.75) 133(-10.8,-3.25) 134(-10.8,-3.75) 135(-10.8,-4.25) 136(-10.8,-4.75) 137(-10.8,-5.25) 138(-10.8,-5.75) 139(-10.8,-6.25) 140(-10.8,-6.75) 141(-10.8,-7.25) 142(-10.8,-7.75) 143(-10.8,-8.25) 144(-10.8,-8.75)
  silkscreen extent -10.41,-11.25 10.08,10.08
Switch [mm] "SW-SMD_L3.9-W2.9-P4.15-LS5.0"
  rect 1.35x2 smd: 1(-2.25,0) 2(2.25,0)
  silkscreen extent -2,-1.45 2,1.45
Testpoint [mm] "HDR-TH_1P-P2.54-V-M"
  rect 1.7x1.7 hole 1.1: 1(0,0)
  silkscreen extent -1.27,-1.27 1.27,1.27
TPS62932DRLR [mm] "SMD-8_L2.1-W1.2-P0.50-LS1.6-BL"
  oval 0.28x0.864 smd: 1(-0.75,-0.632) 2(-0.25,-0.632) 3(0.25,-0.632) 4(0.75,-0.632) 5(0.75,0.632) 6(0.25,0.632) 7(-0.25,0.632) 8(-0.75,0.632)
  silkscreen extent -1.34,-0.97 1.1,0.6
XT60PW-F [mm] "TH_2P-XT60PW-F"
  oval 1.3x2.2 hole 0.6 slot 1.5 at 90 deg paste+0 mask+0.05: 1(-6.75,3) 2(6.75,3)
  round 3.8 hole 2.8 paste+0 mask+0.05: 3(-3.6,-3) 4(3.6,-3)
  silkscreen extent -7.75,-4.75 7.75,12.52
ZX-XH2.54-2PZZ [mm] "CONN-TH_2P-P2.50_HX25003-2A"
  rect 1.8x1.8 hole 1.1 paste+0 mask+0.05: 1(-1.25,0)
  round 1.8 hole 1.1 paste+0 mask+0.05: 2(1.25,0)
  silkscreen extent -3.75,-3.7 3.75,2.41
ZX-XH2.54-4PZZ [mm] "CONN-TH_4P-P2.50_4PIN"
  rect 1.524x1.6 hole 1.1: 1(-3.75,0)
  round 1.6 hole 1.1: 2(-1.25,0) 3(1.25,0) 4(3.75,0)
  silkscreen extent -6.22,-2.41 6.22,3.56

## Part data
C1 C2 C3 C19 C20 C21 C37 C38: library part C0603_10nF, "0603电容", JLCPCB Part Class="Basic Part", LCSC Part Name="10nF ±10% 50V", Manufacturer=SAMSUNG(三星), Manufacturer Part=CC0603KRX7R9BB104, Temperature Coefficient=X7R, Tolerance=±10%, Voltage Rated=50V, Add into BOM=yes, Convert to PCB=yes, Datasheet=https://atta.szlcsc.com/upload/public/pdf/source/20180910/C282072_33301C7F631E79921B82A8DAC6BCC5B3.pdf, Device=CC0603KRX7R9BB104, Name=10nF, Supplier=LCSC, Supplier Footprint=0603, Supplier Part=C100042, Symbol=CC0603KRX7R9BB104
C4 C5 C6 C7 C8 C9 C13 C17 C18 C22 C23 C24 C25 C26 C27 C34 C35 C36 C39 C40 C41 C42 C47 C48 C67 C71 C82 C83: library part C0603_100nF, "0603电容", JLCPCB Part Class="Basic Part", LCSC Part Name="100nF ±10% 50V", Manufacturer=SAMSUNG(三星), Manufacturer Part=CC0603KRX7R9BB104, Temperature Coefficient=X7R, Tolerance=±10%, Voltage Rated=50V, Add into BOM=yes, Convert to PCB=yes, Datasheet=https://atta.szlcsc.com/upload/public/pdf/source/20180910/C282072_33301C7F631E79921B82A8DAC6BCC5B3.pdf, Device=CC0603KRX7R9BB104, Name=100nF, Supplier=LCSC, Supplier Footprint=0603, Supplier Part=C6119867, Symbol=CC0603KRX7R9BB104
C10 C11 C12 C28 C29 C30 C43 C44: library part SMD6.3_7.7_100uF, "贴片型铝电解电容 容值 100uF 精度 ±20% 额定电压 35V 纹波电流 87mA@120kHz", Equivalent Series Resistance(ESR)=-, JLCPCB Part Class="Extended Part", LCSC Part Name="100uF ±20% 35V", Lifetime @ Temp=2000hrs@105℃, Manufacturer=KNSCHA(科尼盛), Manufacturer Part=RVT100UF35V67RV0034, Operating Temperature=-55℃~+105℃, Rated Voltage=35V, Ripple Current=87mA@120kHz, Tolerance=±20%, Add into BOM=yes, Comment_1=100uF, Convert to PCB=yes, Datasheet=https://atta.szlcsc.com/upload/public/pdf/source/20210528/C2836442_7F6389BF36F63F32D6DF3A507E8E95D6.pdf, Device=RVT100UF35V67RV0034, L=7.7mm, Supplier=LCSC, Supplier Footprint=SMD,D6.3xL7.7mm, Supplier Part=C2836442, Symbol=RVT100UF35V67RV0034, φD=6.3mm
C14 C15 C16 C31 C32 C33 C45 C46 C74: library part C0603_470nF, "0603电容", JLCPCB Part Class="Basic Part", LCSC Part Name="470nF ±10% 25V", Manufacturer=SAMSUNG(三星), Manufacturer Part=CC0603KRX7R9BB104, Temperature Coefficient=X7R, Tolerance=±10%, Voltage Rated=25V, Add into BOM=yes, Convert to PCB=yes, Datasheet=https://atta.szlcsc.com/upload/public/pdf/source/20180910/C282072_33301C7F631E79921B82A8DAC6BCC5B3.pdf, Device=CC0603KRX7R9BB104, Name=470nF, Supplier=LCSC, Supplier Footprint=0603, Supplier Part=C1623, Symbol=CC0603KRX7R9BB104
C49 C51 C55 C56 C57 C58 C59 C60 C61 C62 C63 C64 C65 C66 C77 C79 C87: library part C0402_100nF, "0402电容", JLCPCB Part Class="Extended Part", LCSC Part Name="100nF ±10% 50V", Manufacturer=muRata(村田), Manufacturer Part=GRM155R71H104KE14D, Temperature Coefficient=X7R, Tolerance=±10%, Voltage Rated=50V, Add into BOM=yes, Comment_1=100nF, Convert to PCB=yes, Datasheet=https://atta.szlcsc.com/upload/public/pdf/source/20180326/C77020_39BD49C951FF1AF0DB1F1FAC5AC1E401.pdf, Device=GRM155R71H104KE14D, Supplier=LCSC, Supplier Footprint=0402, Supplier Part=C77020, Symbol=GRM155R71H104KE14D
C50 C86: library part C0402_10uF, "0402电容", JLCPCB Part Class="Basic Part", LCSC Part Name="10uF ±20% 6.3V", Manufacturer=SAMSUNG(三星), Manufacturer Part=CL05A106MQ5NUNC, Temperature Coefficient=X5R, Tolerance=±20%, Voltage Rated=6.3V, Add into BOM=yes, Comment_1=10uF, Convert to PCB=yes, Datasheet=https://atta.szlcsc.com/upload/public/pdf/source/20220823/2B02EE04F8F211D38A52DCB16EB6BEBA.pdf, Device=CL05A106MQ5NUNC, Supplier=LCSC, Supplier Footprint=0402, Supplier Part=C15525, Symbol=CL05A106MQ5NUNC
C52: library part C0603_22uF, "0603电容", JLCPCB Part Class="Basic Part", LCSC Part Name="22uF ±20% 16V", Manufacturer=SAMSUNG(三星), Manufacturer Part=CC0603KRX7R9BB104, Temperature Coefficient=X5R, Tolerance=±20%, Voltage Rated=16V, Add into BOM=yes, Convert to PCB=yes, Datasheet=https://atta.szlcsc.com/upload/public/pdf/source/20180910/C282072_33301C7F631E79921B82A8DAC6BCC5B3.pdf, Device=CC0603KRX7R9BB104, Name=22uF, Supplier=LCSC, Supplier Footprint=0603, Supplier Part=C6119868, Symbol=CC0603KRX7R9BB104
C53 C54: library part C0402_10pF, "0402电容", JLCPCB Part Class="Extended Part", LCSC Part Name="10pF ±5% 50V", Manufacturer=FH(风华), Manufacturer Part=0402CG100J500NT, Temperature Coefficient=C0G, Tolerance=±5%, Voltage Rated=50V, Add into BOM=yes, Comment_1=10pF, Convert to PCB=yes, Datasheet=https://atta.szlcsc.com/upload/public/pdf/source/20200305/C486355_26A10D38EF8C2A5C37091D0039909270.pdf, Device=0402CG100J500NT, Supplier=LCSC, Supplier Footprint=0402, Supplier Part=C1545, Symbol=0402CG100J500NT
C68 C69: library part C0402_2.2uF, "容值 2.2uF   精度 ±20%   额定电压 6.3V   材质(温度系数) X5R", JLCPCB Part Class="Basic Part", LCSC Part Name="2.2uF ±20% 6.3V", Manufacturer=SAMSUNG(三星), Manufacturer Part=CL05A225MQ5NSNC, Temperature Coefficient=X5R, Tolerance=±20%, Voltage Rated=6.3V, Add into BOM=yes, Comment_1=2.2uF, Convert to PCB=yes, Datasheet=https://atta.szlcsc.com/upload/public/pdf/source/20160218/1457707763339.pdf, Device=CL05A225MQ5NSNC, Supplier=LCSC, Supplier Footprint=0402, Supplier Part=C12530, Symbol=CL05A225MQ5NSNC
C70: library part C1206_4.7uF, "1206电容", JLCPCB Part Class="Extended Part", LCSC Part Name="4.7uF ±10% 50V", Manufacturer=SAMSUNG(三星), Manufacturer Part=CL31B475KBHNNNE, Temperature Coefficient=X7R, Tolerance=±10%, Voltage Rated=50V, Add into BOM=yes, Comment_1=4.7uF, Convert to PCB=yes, Datasheet=https://atta.szlcsc.com/upload/public/pdf/source/20160218/1457707763339.pdf, Device=CL31B475KBHNNNE, Supplier=LCSC, Supplier Footprint=1206, Supplier Part=C51205, Symbol=CL31B475KBHNNNE
C72: library part C0603_2.2uF, "0603电容", JLCPCB Part Class="Basic Part", LCSC Part Name="2.2uF ±10% 16V", Manufacturer=SAMSUNG(三星), Manufacturer Part=CC0603KRX7R9BB104, Temperature Coefficient=X5R, Tolerance=±10%, Voltage Rated=16V, Add into BOM=yes, Convert to PCB=yes, Datasheet=https://atta.szlcsc.com/upload/public/pdf/source/20180910/C282072_33301C7F631E79921B82A8DAC6BCC5B3.pdf, Device=CC0603KRX7R9BB104, Name=2.2uF, Supplier=LCSC, Supplier Footprint=0603, Supplier Part=C23630, Symbol=CC0603KRX7R9BB104
C73: library part C1206_15nF, "1206电容", JLCPCB Part Class="Extended Part", LCSC Part Name="15nF ±10% 50V", Manufacturer=Chinocera(华瓷), Manufacturer Part=CL31B475KBHNNNE, Temperature Coefficient=X7R, Tolerance=±10%, Voltage Rated=50V, Add into BOM=yes, Comment_1=15nF, Convert to PCB=yes, Datasheet=https://atta.szlcsc.com/upload/public/pdf/source/20160218/1457707763339.pdf, Device=CL31B475KBHNNNE, Supplier=LCSC, Supplier Footprint=1206, Supplier Part=C5186924, Symbol=CL31B475KBHNNNE
C75: library part C0805_82pF, "0805电容", JLCPCB Part Class="Extended Part", LCSC Part Name="82pF ±1% 50V", Manufacturer=YAGEO(国巨), Manufacturer Part=CC0805FRNPO9BN820, Temperature Coefficient=NP0, Tolerance=±1%, Voltage Rated=50V, Add into BOM=yes, Comment_1=82pF, Convert to PCB=yes, Datasheet=https://atta.szlcsc.com/upload/public/pdf/source/20200508/C527189_AF3BD45761C292EB11165A31B5122D16.pdf, Device=CC0805FRNPO9BN820, Supplier=LCSC, Supplier Footprint=0805, Supplier Part=C527189, Symbol=CC0805FRNPO9BN820
C76: library part SMD6.3_10_180uF, "贴片型铝电解电容", Equivalent Series Resistance(ESR)=11mΩ@100kHz, JLCPCB Part Class="Extended Part", LCSC Part Name="180uF ±20% 16V", Lifetime @ Temp=2000hrs@105℃, Manufacturer=PANASONIC(松下), Manufacturer Part=16SVPE180M, Operating Temperature=-55℃~+105℃, Rated Voltage=16V, Ripple Current=4.46A@100kHz, Tolerance=±20%, Add into BOM=yes, Comment_1=180uF, Convert to PCB=yes, Datasheet=https://atta.szlcsc.com/upload/public/pdf/source/20171113/C88141_15105616557631116145.pdf, Device=16SVPE180M, L=10mm, Lead Spacing=-, Supplier=LCSC, Supplier Footprint=SMD,D6.3xL10mm, Supplier Part=C88141, Symbol=16SVPE180M, Type=聚合物, φD=6.3mm
C78: library part C1206_10uF, "1206电容", JLCPCB Part Class="Extended Part", LCSC Part Name="10uF ±10% 50V", Manufacturer=SAMSUNG(三星), Manufacturer Part=CL31B475KBHNNNE, Temperature Coefficient=X7R, Tolerance=±10%, Voltage Rated=50V, Add into BOM=yes, Comment_1=10uF, Convert to PCB=yes, Datasheet=https://atta.szlcsc.com/upload/public/pdf/source/20160218/1457707763339.pdf, Device=CL31B475KBHNNNE, Supplier=LCSC, Supplier Footprint=1206, Supplier Part=C89632, Symbol=CL31B475KBHNNNE
C80 C81: library part SMD5_5.4_10uF, "贴片型铝电解电容", Equivalent Series Resistance(ESR)=-, JLCPCB Part Class="Extended Part", LCSC Part Name="10uF ±20% 50V", Lifetime @ Temp=2000hrs@105℃, Manufacturer=KNSCHA(科尼盛), Manufacturer Part=RST10UF50V016, Operating Temperature=-40℃~+105℃, Rated Voltage=50V, Ripple Current=24mA@120Hz, Tolerance=±20%, Add into BOM=yes, Comment_1=10uF, Convert to PCB=yes, Datasheet=https://atta.szlcsc.com/upload/public/pdf/source/20220722/47144637C831FC4476CE4962252D8002.pdf, Device=RST10UF50V016, L=5.4mm, Supplier=LCSC, Supplier Footprint=SMD,D5xL5.4mm, Supplier Part=C4747971, Symbol=RST10UF50V016, φD=5mm
C84: library part C0402_33nF, "0402电容", JLCPCB Part Class="Extended Part", LCSC Part Name="33nF ±10% 50V", Manufacturer=FOJAN(富捷), Manufacturer Part=GRM155R71H104KE14D, Temperature Coefficient=X7R, Tolerance=±10%, Voltage Rated=50V, Add into BOM=yes, Comment_1=33nF, Convert to PCB=yes, Datasheet=https://atta.szlcsc.com/upload/public/pdf/source/20180326/C77020_39BD49C951FF1AF0DB1F1FAC5AC1E401.pdf, Device=GRM155R71H104KE14D, Supplier=LCSC, Supplier Footprint=0402, Supplier Part=C7419416, Symbol=GRM155R71H104KE14D
C85: library part C1206_47uF, "1206电容", JLCPCB Part Class="Extended Part", LCSC Part Name="47uF ±20% 25V", Manufacturer=HRE(芯声), Manufacturer Part=CL31B475KBHNNNE, Temperature Coefficient=X5R, Tolerance=±20%, Voltage Rated=25V, Add into BOM=yes, Comment_1=47uF, Convert to PCB=yes, Datasheet=https://atta.szlcsc.com/upload/public/pdf/source/20160218/1457707763339.pdf, Device=CL31B475KBHNNNE, Supplier=LCSC, Supplier Footprint=1206, Supplier Part=C6119973, Symbol=CL31B475KBHNNNE
CN1 CN2 CN3 CN4 CN5 CN6 CN7 CN8: library part ZX-XH2.54-4PZZ, "直插插针", Current Rating (Max)=3A, JLCPCB Part Class="Extended Part", Manufacturer=Megastar(兆星), Operating Temperature Range=-25℃~+85℃, Add into BOM=yes, Comment_1=#NAME?, Contact Material=黄铜, Contact Plating=锡, Convert to PCB=yes, Datasheet=https://atta.szlcsc.com/upload/public/pdf/source/20230619/B529A2163E0159A644AB3383D208FB03.pdf, Device=ZX-XH2.54-4PZZ, LCSC Part Name=ZX-XH2.54-4PZZ, Manufacturer Part=ZX-XH2.54-4PZZ, Mounting Style=直插, Number of Pins=4P, Number of PINs Per Row=4, Number of Rows=1, Pins Structure=1x4P, Pitch=2.54mm, Reference Series=XH, Row Spacing=-, Supplier=LCSC, Supplier Footprint=插件,P=2.54mm, Supplier Part=C7429634, Symbol=ZX-XH2.54-4PZZ
CN9: library part ZX-XH2.54-2PZZ, "直插插针", Current Rating (Max)=3A, JLCPCB Part Class="Extended Part", Manufacturer=Megastar(兆星), Operating Temperature Range=-25℃~+85℃, Add into BOM=yes, Comment_1=#NAME?, Contact Material=黄铜, Contact Plating=锡, Convert to PCB=yes, Datasheet=https://atta.szlcsc.com/upload/public/pdf/source/20230619/19BA6947230AA44A04D3EDD65E618FD0.pdf, Device=ZX-XH2.54-2PZZ, LCSC Part Name=ZX-XH2.54-2PZZ, Manufacturer Part=ZX-XH2.54-2PZZ, Mounting Style=直插, Number of Pins=2P, Number of PINs Per Row=2, Number of Rows=1, Pins Structure=1x2P, Pitch=2.54mm, Reference Series=XH, Row Spacing=-, Supplier=LCSC, Supplier Footprint=插件,P=2.54mm, Supplier Part=C7429632, Symbol=ZX-XH2.54-2PZZ
H1 H2 H3 H4 H5 H6 H7 H8: library part HC-1.25-3PLT, "排针3P", Color=黑色, Current Rating (Max)=3A, JLCPCB Part Class="Extended Part", LCSC Part Name="间距:2.54mm 1x3P 直插 方针", Manufacturer=XFCN(兴飞), Manufacturer Part=PZ254V-11-03P, Operating Temperature Range=-40℃~+105℃, Voltage Rating (Max)=250V, Add into BOM=yes, Circluar Pins/Square Pins=方针, Comment_1=#NAME?, Convert to PCB=yes, Datasheet=https://atta.szlcsc.com/upload/public/pdf/source/20200309/C492402_8335C3D49C4E4C618838D59BB1D024C1.pdf, Device=PZ254V-11-03P, Insulation Height=2.5mm, Length of End Connection Pin=3mm, Length of Mating Pin=6mm, Mounting Type=直插, Number of Pins=3P, Number of Rows=单排, Pin Structure=1x3P, Pitch=2.54mm, Row Spacing=-, Supplier=LCSC, Supplier Footprint=插件,P=2.54mm, Supplier Part=C2937625, Symbol=PZ254V-11-03P_C2937625
H9 H10 H11: library part Testpoint, "测试点", Color=黑色, Current Rating (Max)=-, JLCPCB Part Class="Extended Part", LCSC Part Name="间距:2.54mm 1x1P 直插 方针", Manufacturer=XFCN(兴飞), Manufacturer Part=PZ254V-11-01P, Operating Temperature Range=-40℃~+105℃, Add into BOM=yes, Circluar Pins/Square Pins=方针, Comment_1=#NAME?, Contact Material=黄铜, Contact Plating=-, Convert to PCB=yes, Datasheet=https://atta.szlcsc.com/upload/public/pdf/source/20200309/C492400_46876A5B545F5AE6B8D4A09C46E276E8.pdf, Device=PZ254V-11-01P, Insulation Height=2.5mm, Length of End Connection Pin=3mm, Length of Mating Pin=6mm, Mounting Type=直插, Number of Pins=1P, Number of Rows=单排, Pin Structure=1x1P, Pitch=2.54mm, Row Spacing=-, Supplier=LCSC, Supplier Footprint=插件,P=2.54mm, Supplier Part=C492400, Symbol=PZ254V-11-01P, Voltage Rating (Max)=-
H12: library part HC-1.25-8PLT, "排针8P", Color=黑色, Current Rating (Max)=-, JLCPCB Part Class="Extended Part", LCSC Part Name="间距:2.54mm 2x4P 直插 方针", Manufacturer=XFCN(兴飞), Manufacturer Part=PZ254V-12-8P, Operating Temperature Range=-40℃~+105℃, Add into BOM=yes, Circluar Pins/Square Pins=方针, Comment_1=#NAME?, Contact Material=黄铜, Contact Plating=-, Convert to PCB=yes, Datasheet=https://atta.szlcsc.com/upload/public/pdf/source/20200309/C492421_DC8A206AF99CD7755BD4A5B0BC48200B.pdf, Device=PZ254V-12-8P, Insulation Height=2.5mm, Length of End Connection Pin=3mm, Length of Mating Pin=6mm, Mounting Type=直插, Number of Pins=8P, Number of Rows=双排, Pin Structure=2x4P, Pitch=2.54mm, Row Spacing=2.54mm, Supplier=LCSC, Supplier Footprint=插件,P=2.54mm, Supplier Part=C492421, Symbol=PZ254V-12-8P, Voltage Rating (Max)=-
L1 L2: library part L0603_22uH, "0603电感", DC Resistance (DCR)=2.4Ω, Frequency - Self Resonant=-, JLCPCB Part Class="Extended Part", LCSC Part Name="22uH ±20% 55mA", Manufacturer=TDK, Manufacturer Part=MLZ1608M220WT000, Saturation Current (Isat)=55mA, Tolerance=±20%, Add into BOM=yes, Comment_1=22uH, Convert to PCB=yes, Datasheet=https://atta.szlcsc.com/upload/public/pdf/source/20160918/1474166926388.pdf, Device=MLZ1608M220WT000, Q @ Freq=-, Rated Current=-, Ratings=-, Supplier=LCSC, Supplier Footprint=0603, Supplier Part=C383393, Symbol=MLZ1608M220WT000
L3: library part L1360_3.3uH, "电感值 3.3uH   精度 ±20%   额定电流 16A   饱和电流(Isat) 22A   直流电阻(DCR) 6mΩ   类型 一体成型电感", DC Resistance (DCR)=6mΩ, JLCPCB Part Class="Extended Part", LCSC Part Name="3.3uH ±20% 22A", Manufacturer=SXN(顺翔诺), Manufacturer Part=SMMS1360-3R3M, Rated Current=16A, Saturation Current (Isat)=22A, Tolerance=±20%, Add into BOM=yes, Comment_1=3.3uH, Convert to PCB=yes, Datasheet=https://atta.szlcsc.com/upload/public/pdf/source/20210810/BBF24330FB2F5029F637830BA9C42C0D.pdf, Device=SMMS1360-3R3M, Supplier=LCSC, Supplier Footprint=SMD, Supplier Part=C149526, Symbol=SMMS1360-3R3M, Type=一体成型电感
L4: library part L1110_10uH, "功率电感", DC Resistance (DCR)=19.3mΩ, JLCPCB Part Class="Extended Part", LCSC Part Name="10uH ±20%", Manufacturer=YJYCOIN(益嘉源), Manufacturer Part=YSPI1050-100M, Rated Current=6A, Tolerance=±20%, Add into BOM=yes, Comment_1=10uH, Convert to PCB=yes, Datasheet=https://atta.szlcsc.com/upload/public/pdf/source/20240507/CDF618C6C30EFC34B42EA1108EE1A6A7.pdf, Device=YSPI1050-100M, Supplier=LCSC, Supplier Footprint=SMD,11x10mm, Supplier Part=C497897, Symbol=YSPI1050-100M
LED1 LED2_+24V LED3_+5V LED4_+3.3V: library part LED, "发光二极管 绿色", Color Temperature=-, Emitted Color=翠绿色, Forward Current=20mA, JLCPCB Part Class="Extended Part", LCSC Part Name=翠绿, Lens Color=无色透明透镜, Manufacturer=MEIHUA(美华), Manufacturer Part=MHT192UGCT, Operating Temperature=-40℃~+85℃, Power Dissipation=60mW, Add into BOM=yes, Comment_1=#NAME?, Convert to PCB=yes, Datasheet=https://atta.szlcsc.com/upload/public/pdf/source/20190515/C389519_7BC27E831414348C8AF19AF18EE4BF58.pdf, Device=MHT192UGCT, Diode Configuration=-, Dominant Wavelength=515nm~530nm, Mounting Sytle=-, Peak Wavelength=518nm, Supplier=LCSC, Supplier Footprint=0603, Supplier Part=C389519, Symbol=MHT192UGCT, Viewing Angle=120°
Q1: library part NMOS, "1个N沟道 耐压:30V 电流:86A", Continuous Drain Current (Id)=86A, Drain Source On Resistance (RDS(on)@Vgs,Id)=5.8mΩ@10V,25A, Drain Source Voltage (Vdss)=30V, Gate Threshold Voltage (Vgs(th)@Id)=2.35V@50uA, Input Capacitance (Ciss@Vds)=2.15nF@15V, JLCPCB Part Class="Extended Part", Manufacturer=Infineon(英飞凌), Manufacturer Part=IRLR8726TRPBF, Operating Temperature=-55℃~+175℃@(Tj), Power Dissipation (Pd)=75W, Add into BOM=yes, Comment_1=#NAME?, Convert to PCB=yes, Datasheet=https://atta.szlcsc.com/upload/public/pdf/source/20170518/1495085732211.pdf, Device=IRLR8726TRPBF, LCSC Part Name="1个N沟道 耐压:30V 电流:86A", Supplier=LCSC, Supplier Footprint=TO-252-2(DPAK), Supplier Part=C81137, Symbol=IRLR8726TRPBF, Total Gate Charge (Qg@Vgs)=23nC@4.5V, Type=1个N沟道
Q2: library part CSD18533Q5A, "NMOS 漏源电压(Vdss) 60V   连续漏极电流(Id) 17A；100A   功率(Pd) 3.2W；116W   导通电阻(RDS(on)@Vgs,Id) 5.9mΩ@10V,18A", Continuous Drain Current (Id)=17A；100A, Drain Source On Resistance (RDS(on)@Vgs,Id)=5.9mΩ@10V,18A, Drain Source Voltage (Vdss)=60V, Gate Threshold Voltage (Vgs(th)@Id)=2.3V@250uA, Input Capacitance (Ciss@Vds)=2.75nF@30V, JLCPCB Part Class="Extended Part", LCSC Part Name="1个N沟道 耐压:60V 电流:17A 电流:100A", Manufacturer=TI(德州仪器), Operating Temperature=-55℃~+150℃@(Tj), Power Dissipation (Pd)=3.2W；116W, Add into BOM=yes, Comment_1=#NAME?, Convert to PCB=yes, Datasheet=https://www.ti.com/cn/lit/gpn/csd18533q5a, Device=CSD18533Q5A, Manufacturer Part=CSD18533Q5A, Supplier=LCSC, Supplier Footprint=VSONP-8(5x6), Supplier Part=C130170, Symbol=CSD18533Q5A, Total Gate Charge (Qg@Vgs)=36nC@10V, Type=1个N沟道
R1 R2 R3 R16 R17 R18 R31 R32 R43: library part R0603_1MΩ, "0603电阻", JLCPCB Part Class="Basic Part", LCSC Part Name="1MΩ ±1% 100mW 厚膜电阻", Manufacturer=UNI-ROYAL(厚声), Manufacturer Part=0603WAF5100T5E, Operating Temperature Range=-55℃~+155℃, Overload Voltage (Max)=75V, Power(Watts)=100mW, Temperature Coefficient=±100ppm/℃, Tolerance=±1%, Add into BOM=yes, Convert to PCB=yes, Datasheet=https://atta.szlcsc.com/upload/public/pdf/source/20200306/C422600_1E6D84923E4A46A82E41ADD87F860B5C.pdf, Device=0603WAF5100T5E, Name=1MΩ, Supplier=LCSC, Supplier Footprint=0603, Supplier Part=C22935, Symbol=0603WAF5100T5E, Type=厚膜电阻
R4 R5 R6 R7 R8 R9 R19 R20 R21 R22 R23 R24 R33 R34 R35 R36: library part R1206_200mΩ, "1206电阻", JLCPCB Part Class="Extended Part", LCSC Part Name="200mΩ ±1% 250mW 厚膜电阻", Manufacturer=UNI-ROYAL(厚声), Manufacturer Part=1206W4F200LT5E, Operating Temperature Range=-55℃~+155℃, Overload Voltage (Max)=200V, Power(Watts)=250mW, Temperature Coefficient=±800ppm/℃, Tolerance=±1%, Add into BOM=yes, Comment_1=200mΩ, Convert to PCB=yes, Datasheet=https://atta.szlcsc.com/upload/public/pdf/source/20200306/C422600_1E6D84923E4A46A82E41ADD87F860B5C.pdf, Device=1206W4F200LT5E, Supplier=LCSC, Supplier Footprint=1206, Supplier Part=C25335, Symbol=1206W4F200LT5E, Type=厚膜电阻
R10 R11 R12 R25 R26 R27 R37 R38 R44 R45 R49 R51 R56: library part R0603_10KΩ, "0603电阻", JLCPCB Part Class="Basic Part", LCSC Part Name="厚膜电阻 10kΩ ±1% 100mW", Manufacturer=UNI-ROYAL(厚声), Manufacturer Part=0603WAF1002T5E, Operating Temperature Range=-55℃~+155℃, Overload Voltage (Max)=75V, Power(Watts)=100mW, Temperature Coefficient=±100ppm/℃, Tolerance=±1%, Add into BOM=yes, Comment_1=10kΩ, Convert to PCB=yes, Datasheet=https://atta.szlcsc.com/upload/public/pdf/source/20200306/C422600_1E6D84923E4A46A82E41ADD87F860B5C.pdf, Device=0603WAF1002T5E, Supplier=LCSC, Supplier Footprint=0603, Supplier Part=C25804, Symbol=0603WAF1002T5E, Type=厚膜电阻
R13 R14 R15 R28 R29 R30 R39 R40: library part R10k_KT, "可调电阻/电位器   阻值 10kΩ   精度 ±25%   额定电压 -   功率 150mW   温度系数 ±250ppm/℃   圈数 1", JLCPCB Part Class="Extended Part", LCSC Part Name="10kΩ ±25%", Manufacturer=BOURNS, Manufacturer Part=TC33X-2-103E, Power(Watts)=150mW, Rated Voltage=-, Temperature Coefficient=±250ppm/℃, Tolerance=±25%, Add into BOM=yes, Comment_1=10kΩ, Convert to PCB=yes, Datasheet=https://atta.szlcsc.com/upload/public/pdf/source/20200810/C720646_BB66A75E654D5E1D30127FF45BCD3C26.pdf, Device=TC33X-2-103E, Supplier=LCSC, Supplier Footprint=SMD-3P,3.8x3.6mm, Supplier Part=C719176, Symbol=TC33X-2-103E, Turns=1
R41 R42 R53 R54 R55: library part R0603_0Ω, "阻值 0Ω   精度 ±1%   功率 100mW   最大工作电压 75V   工作温度范围 -55℃~+155℃", JLCPCB Part Class="Basic Part", LCSC Part Name="0Ω ±1% 100mW 厚膜电阻", Manufacturer=UNI-ROYAL(厚声), Manufacturer Part=0603WAF0000T5E, Operating Temperature Range=-55℃~+155℃, Overload Voltage (Max)=75V, Power(Watts)=100mW, Tolerance=±1%, Add into BOM=yes, Comment_1=0Ω, Convert to PCB=yes, Datasheet=https://atta.szlcsc.com/upload/public/pdf/source/20200306/C422600_1E6D84923E4A46A82E41ADD87F860B5C.pdf, Device=0603WAF0000T5E, Supplier=LCSC, Supplier Footprint=0603, Supplier Part=C21189, Symbol=0603WAF0000T5E, Type=厚膜电阻
R46: library part R0603_2KΩ, "0603电阻", JLCPCB Part Class="Basic Part", LCSC Part Name="2kΩ ±1% 100mW 厚膜电阻", Manufacturer=UNI-ROYAL(厚声), Manufacturer Part=0603WAF2001T5E, Operating Temperature Range=-55℃~+155℃, Overload Voltage (Max)=75V, Power(Watts)=100mW, Temperature Coefficient=±100ppm/℃, Tolerance=±1%, Add into BOM=yes, Comment_1=2kΩ, Convert to PCB=yes, Datasheet=https://atta.szlcsc.com/upload/public/pdf/source/20200306/C422600_1E6D84923E4A46A82E41ADD87F860B5C.pdf, Device=0603WAF2001T5E, Supplier=LCSC, Supplier Footprint=0603, Supplier Part=C22975, Symbol=0603WAF2001T5E, Type=厚膜电阻
R47: library part R0603_2.15KΩ, "0603电阻", JLCPCB Part Class="Basic Part", LCSC Part Name="2.15kΩ ±1% 100mW 厚膜电阻", Manufacturer=YAGEO(国巨), Manufacturer Part=0603WAF2001T5E, Operating Temperature Range=-55℃~+155℃, Overload Voltage (Max)=75V, Power(Watts)=100mW, Temperature Coefficient=±100ppm/℃, Tolerance=±1%, Add into BOM=yes, Comment_1=2.15kΩ, Convert to PCB=yes, Datasheet=https://atta.szlcsc.com/upload/public/pdf/source/20200306/C422600_1E6D84923E4A46A82E41ADD87F860B5C.pdf, Device=0603WAF2001T5E, Supplier=LCSC, Supplier Footprint=0603, Supplier Part=C273772, Symbol=0603WAF2001T5E, Type=厚膜电阻
R48: library part R0805_140KΩ, "0805电阻", JLCPCB Part Class="Extended Part", LCSC Part Name="140kΩ ±1% 125mW 厚膜电阻", Manufacturer=UNI-ROYAL(厚声), Manufacturer Part=0805W8F1403T5E, Operating Temperature Range=-55℃~+155℃, Overload Voltage (Max)=150V, Power(Watts)=125mW, Temperature Coefficient=±100ppm/℃, Tolerance=±1%, Add into BOM=yes, Comment_1=140kΩ, Convert to PCB=yes, Datasheet=https://atta.szlcsc.com/upload/public/pdf/source/20200306/C422600_1E6D84923E4A46A82E41ADD87F860B5C.pdf, Device=0805W8F1403T5E, Supplier=LCSC, Supplier Footprint=0805, Supplier Part=C17460, Symbol=0805W8F1403T5E, Type=厚膜电阻
R50: library part R0603_52.3KΩ, "0603电阻", JLCPCB Part Class="Basic Part", LCSC Part Name="厚膜电阻 52.3kΩ ±1% 100mW", Manufacturer=FOJAN(富捷), Manufacturer Part=0603WAF1002T5E, Operating Temperature Range=-55℃~+155℃, Overload Voltage (Max)=75V, Power(Watts)=100mW, Temperature Coefficient=±100ppm/℃, Tolerance=±1%, Add into BOM=yes, Comment_1=52.3kΩ, Convert to PCB=yes, Datasheet=https://atta.szlcsc.com/upload/public/pdf/source/20200306/C422600_1E6D84923E4A46A82E41ADD87F860B5C.pdf, Device=0603WAF1002T5E, Supplier=LCSC, Supplier Footprint=0603, Supplier Part=C2933235, Symbol=0603WAF1002T5E, Type=厚膜电阻
R52: library part R0603_4.7KΩ, "0603电阻", JLCPCB Part Class="Basic Part", LCSC Part Name="厚膜电阻 4.7kΩ ±1% 100mW", Manufacturer=UNI-ROYAL(厚声), Manufacturer Part=0603WAF1002T5E, Operating Temperature Range=-55℃~+155℃, Overload Voltage (Max)=75V, Power(Watts)=100mW, Temperature Coefficient=±100ppm/℃, Tolerance=±1%, Add into BOM=yes, Comment_1=4.7kΩ, Convert to PCB=yes, Datasheet=https://atta.szlcsc.com/upload/public/pdf/source/20200306/C422600_1E6D84923E4A46A82E41ADD87F860B5C.pdf, Device=0603WAF1002T5E, Supplier=LCSC, Supplier Footprint=0603, Supplier Part=C23162, Symbol=0603WAF1002T5E, Type=厚膜电阻
R57: library part R0603_120Ω, "0603电阻", JLCPCB Part Class="Basic Part", LCSC Part Name="120Ω ±1% 100mW 厚膜电阻", Manufacturer=UNI-ROYAL(厚声), Manufacturer Part=0603WAF1200T5E, Operating Temperature Range=-55℃~+155℃, Overload Voltage (Max)=75V, Power(Watts)=100mW, Temperature Coefficient=±100ppm/℃, Tolerance=±1%, Add into BOM=yes, Comment_1=120Ω, Convert to PCB=yes, Datasheet=https://atta.szlcsc.com/upload/public/pdf/source/20200306/C422600_1E6D84923E4A46A82E41ADD87F860B5C.pdf, Device=0603WAF1200T5E, Supplier=LCSC, Supplier Footprint=0603, Supplier Part=C22787, Symbol=0603WAF1200T5E, Type=厚膜电阻
RJ1: library part R20k_KT, "可调电阻，20K", JLCPCB Part Class="Extended Part", LCSC Part Name="20kΩ ±25%", Manufacturer=BOURNS, Manufacturer Part=TC33X-2-203E, Power(Watts)=100mW, Rated Voltage=-, Temperature Coefficient=±250ppm/℃, Tolerance=±25%, Add into BOM=yes, Comment_1=20kΩ, Convert to PCB=yes, Datasheet=https://atta.szlcsc.com/upload/public/pdf/source/20200810/C720646_BB66A75E654D5E1D30127FF45BCD3C26.pdf, Device=TC33X-2-203E, Supplier=LCSC, Supplier Footprint=SMD-3P,3.8x3.6mm, Supplier Part=C720648, Symbol=TC33X-2-203E, Turns=1
SW1: library part Switch, "轻触开关   电路结构 单刀单掷   按钮形状 圆形按钮   作用力 2.5N   安装方式 立贴   开关长度 3.9mm   开关宽度 2.9mm   开关高度 2mm   带支架 不带   触点电流 50mA   额定电压(DC) 12V", Actuator/Cap Color=黑色, Contact Current=50mA, Insulation Resistance=100MΩ, JLCPCB Part Class="Extended Part", LCSC Part Name="3.9*2.9*2mm 立贴 轻触开关", Manufacturer=G-Switch(品赞), Manufacturer Part=GT-TC029B-H020-L1N, Operating Force=2.5N, Operating Temperature=-30℃~+85℃, Voltage Rating (DC)=12V, Actuator Style=圆形按钮, Add into BOM=yes, Circuit=单刀单掷, Comment_1=#NAME?, Convert to PCB=yes, Datasheet=https://atta.szlcsc.com/upload/public/pdf/source/20231124/F8327E72251744D4A6AAF7192EF342CB.pdf, Device=GT-TC029B-H020-L1N, Mechanical Life=10万次, Mounting Style=立贴, Pin Style=SMD接片, Strike Gundam=不带, Supplier=LCSC, Supplier Footprint=SMD, Supplier Part=C843665, Switch Height=2mm, Switch Length=3.9mm, Switch Width=2.9mm, Symbol=GT-TC029B-H020-L1N, With Lamp=无
U1 U2 U3 U4 U5 U6 U7 U8: library part DRV8825PWPR, "步进电机驱动芯片", JLCPCB Part Class="Extended Part", LCSC Part Name="2.5A 45V电机驱动芯片", Manufacturer=TI(德州仪器), Add into BOM=yes, Comment_1=#NAME?, Convert to PCB=yes, Datasheet=https://www.ti.com/cn/lit/gpn/drv8825, Device=DRV8825PWPR, Manufacturer Part=DRV8825PWPR, Supplier=LCSC, Supplier Footprint=HTSSOP-28-EP, Supplier Part=C81582, Symbol=DRV8825PWPR
U9: library part STM32F407ZGT6, "CPU内核：ARM-M4  程序存储容量：1MB  RAM总容量：192KB  GPIO端口数量：114  工作电压范围：1.8V~3.6V  CPU最大主频：168MHz  程序存储器类型：FLASH  工作温度范围：-40℃~+85℃  ADC(位数)：12bit  DAC(位数)：12bit", JLCPCB Part Class="Extended Part", LCSC Part Name="带DSP和FPU的高性能基础系列ARM Cortex-M4 MCU，具有1 MB Flash、168 MHz CPU、ART加速器、以太网和FSMC", Low-Voltage Detect=有, Manufacturer=ST(意法半导体), Operating Temperature Range=-40℃~+85℃, Operating Voltage Range=1.8V~3.6V, ADC (Bit)=12bit, Add into BOM=yes, CCP Capture/Compare=-, Comment_1=#NAME?, communication protocol=-, Convert to PCB=yes, CPU Core=ARM-M4, CPU Maximum Speed=168MHz, DAC (Bit)=12bit, Datasheet=https://atta.szlcsc.com/upload/public/pdf/source/20140801/1457707197138.pdf, Device=STM32F407ZGT6, Direct Memory Access=有, GPIO Ports Number=114, Infrared Data Association=有, Internal Comparator=-, Internal Oscillator=有, LCD Module=有, Manufacturer Part=STM32F407ZGT6, Peripheral/Function=DMA；LCD/LED驱动, Program Memory Type=FLASH, Program Storage Size=1MB, PWM (Bit)=-, RAM Size=192KB, Real-Time Clock=-, Secure Digital Input and Output=-, Supplier=LCSC, Supplier Footprint=LQFP-144(20x20), Supplier Part=C19156, Symbol=STM32F407ZGT6, Universal Serial Bus=有, Watchdog=有
U10: library part XT60PW-F, "卧式插头", Colour=黄色, contact resistance=-, JLCPCB Part Class="Extended Part", LCSC Part Name="AMASS(艾迈斯)插头连接器锂电池组充电接口 航模电调卧式焊板 母头 XT60PW-F", Manufacturer=AMASS(艾迈斯), Add into BOM=yes, Belt length=-, Comment_1=#NAME?, Convert to PCB=yes, Datasheet=https://atta.szlcsc.com/upload/public/pdf/source/20190916/C428722_DFF78979486FCB0B58C1FC563067EC88.pdf, Device=XT60PW-F, FlameRetardantGrade=-, Input=-, InsulationMaterial=-, Interface=-, InterfaceType=ĸͷ, Manufacturer Part=XT60PW-F, MaximumCurrent=-, MetalMaterial=-, NumberOfUSBHoles=-, Output=-, Power=-, RatedCurrent=-, RatedVoltage=-, RecommendedWireGauge=-, Size=-, specifications=-, Supplier=LCSC, Supplier Footprint=-, Supplier Part=C428722, Symbol=XT60PW-F_C428722, Type=卧式插头, Type1=-
U11: library part R0603_147KΩ, "0603电阻", JLCPCB Part Class="Extended Part", LCSC Part Name="147kΩ ±1% 100mW 厚膜电阻", Manufacturer=FOJAN(富捷), Manufacturer Part=FRC0603F1473TS, Operating Temperature Range=-55℃~+155℃, Overload Voltage (Max)=75V, Power(Watts)=100mW, Temperature Coefficient=±100ppm/℃, Tolerance=±1%, Add into BOM=yes, Comment_1=147kΩ, Convert to PCB=yes, Datasheet=https://atta.szlcsc.com/upload/public/pdf/source/20211221/925EC7D7225764EE0046F22065062C87.pdf, Device=FRC0603F1473TS, Supplier=LCSC, Supplier Footprint=0603, Supplier Part=C2998060, Symbol=FRC0603F1473TS, Type=厚膜电阻
U12: library part LM3150MHX/NOPB, "DC-DC电源芯片   功能类型 降压型   输入电压 6V~42V   输出电流 12A   开关频率 1MHz", Input Voltage=6V~42V, JLCPCB Part Class="Extended Part", Manufacturer=TI(德州仪器), Operating Temperature=-40℃~+125℃@(TJ), Output Current (Max)=12A, Switching Frequency=1MHz, Add into BOM=yes, Comment_1=#NAME?, Convert to PCB=yes, Datasheet=https://www.ti.com/cn/lit/gpn/lm3150, Device=LM3150MHX/NOPB, Function=降压型, LCSC Part Name=LM3150MHX/NOPB, Manufacturer Part=LM3150MHX/NOPB, Number of Outputs=1, Supplier=LCSC, Supplier Footprint=HTSSOP-14-EP, Supplier Part=C48112, Symbol=LM3150MHX, Synchronous Rectification=是, Topology=降压式